# Altium PCB linkit-v4-0.3_6layers_smdonly.PcbDoc (part 1 of 5)
Units mil, origin at the board's own origin, x right, y up, seen from the top; angles counter-clockwise.
Board outline 2755.93 x 1377.98 mil, 6 copper layers (Top Layer, Int1 (GND), Int2 (Sign), Int3 (Sign), Int4 (PWR), Bottom Layer), stack 64.425 mil thick; 199 components, 156 nets, 686 pads, 678 vias.
Unrouted connection lines stored in the file: 1.
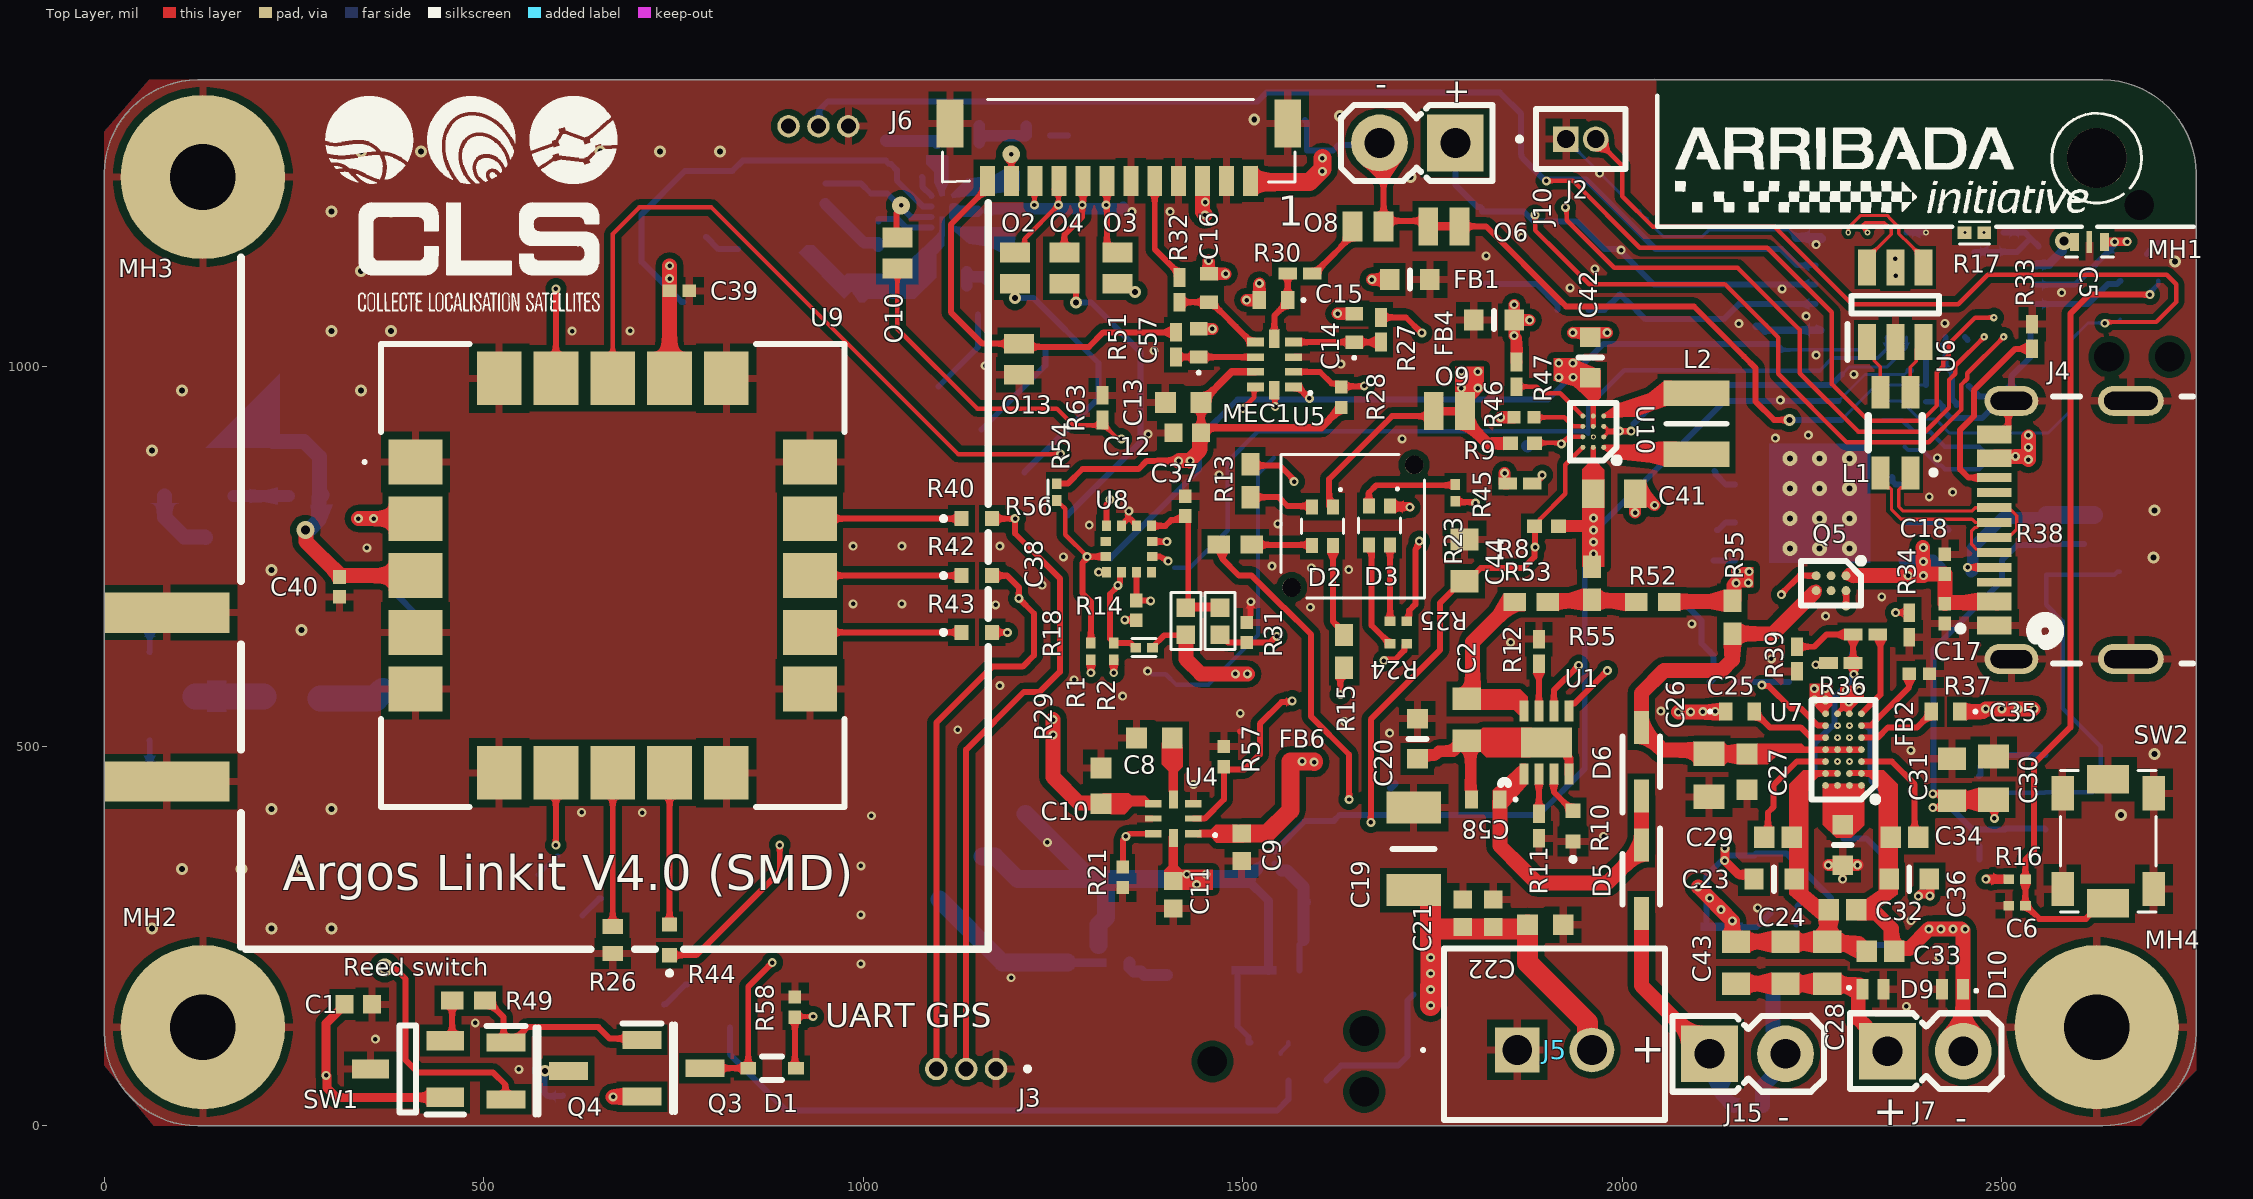
[diagram p0: Top Layer view]
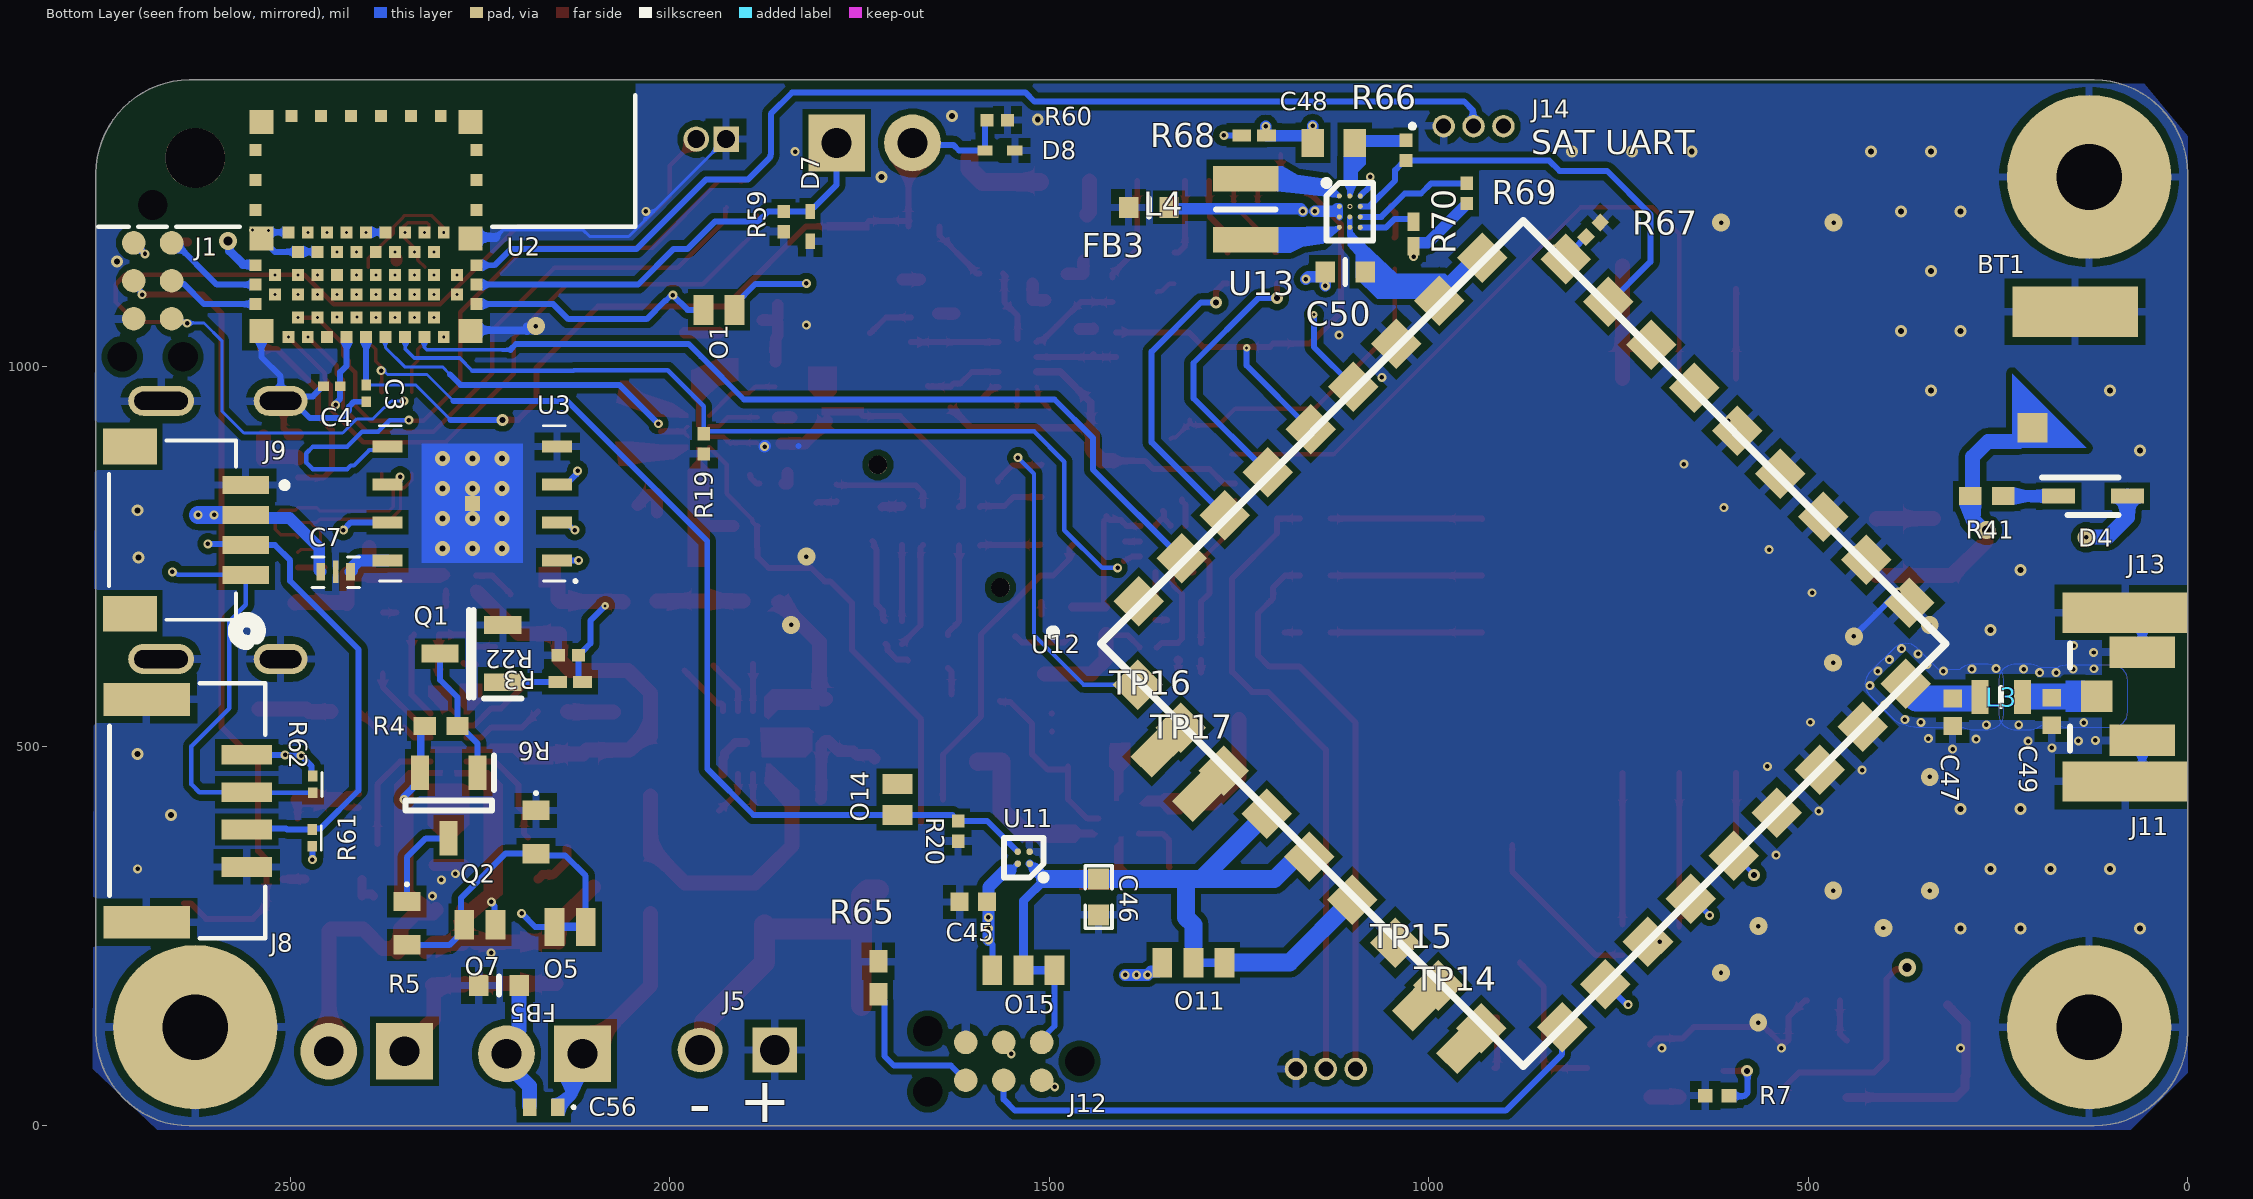
[diagram p1: Bottom Layer view, seen from below]
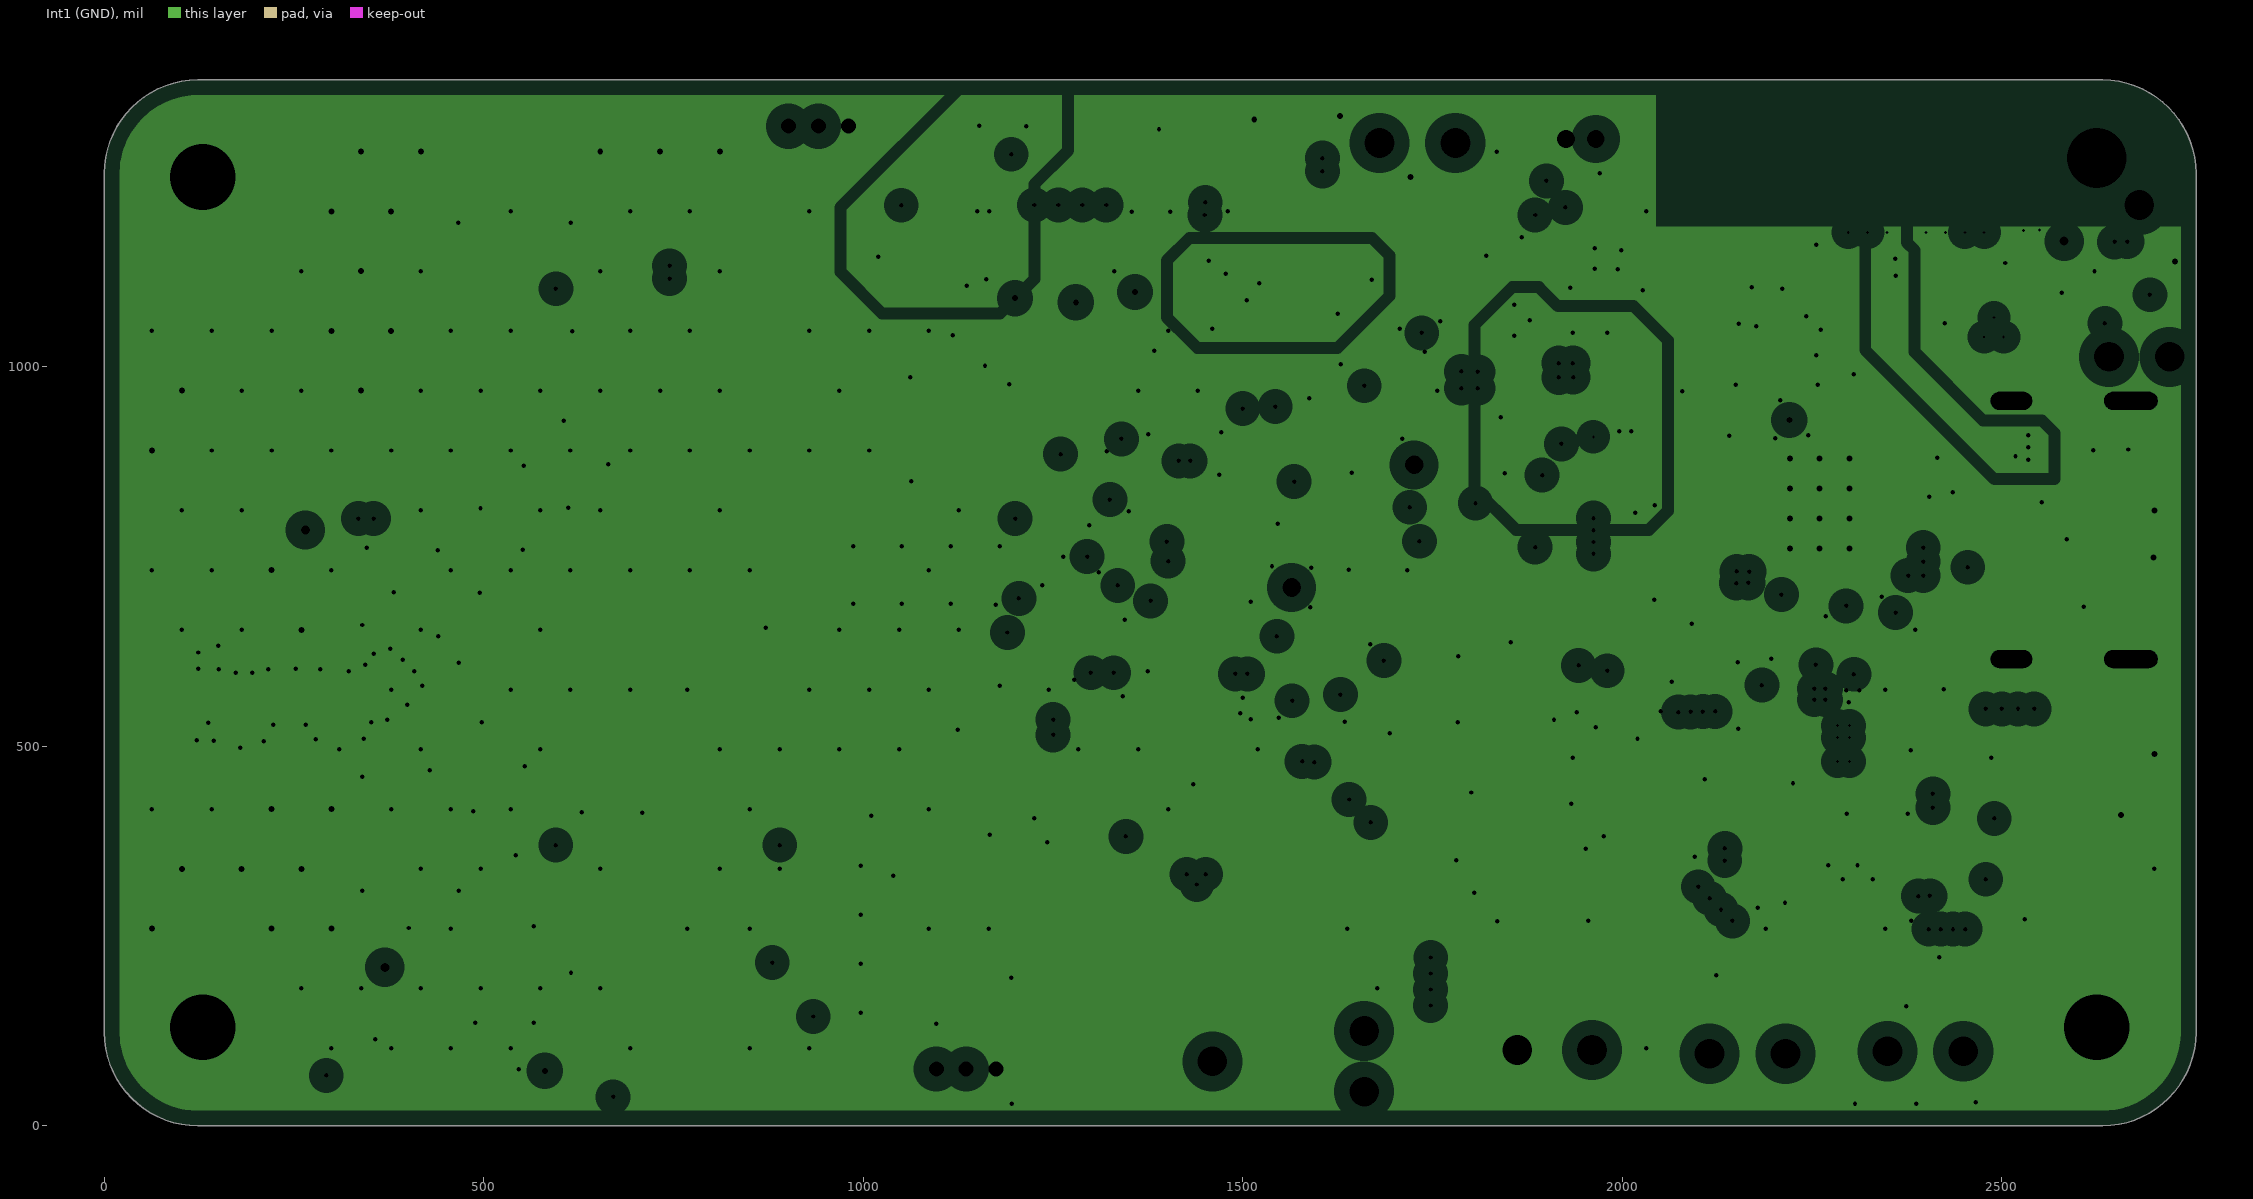
[diagram p2: Int1 (GND), clearances drawn from the general rule]
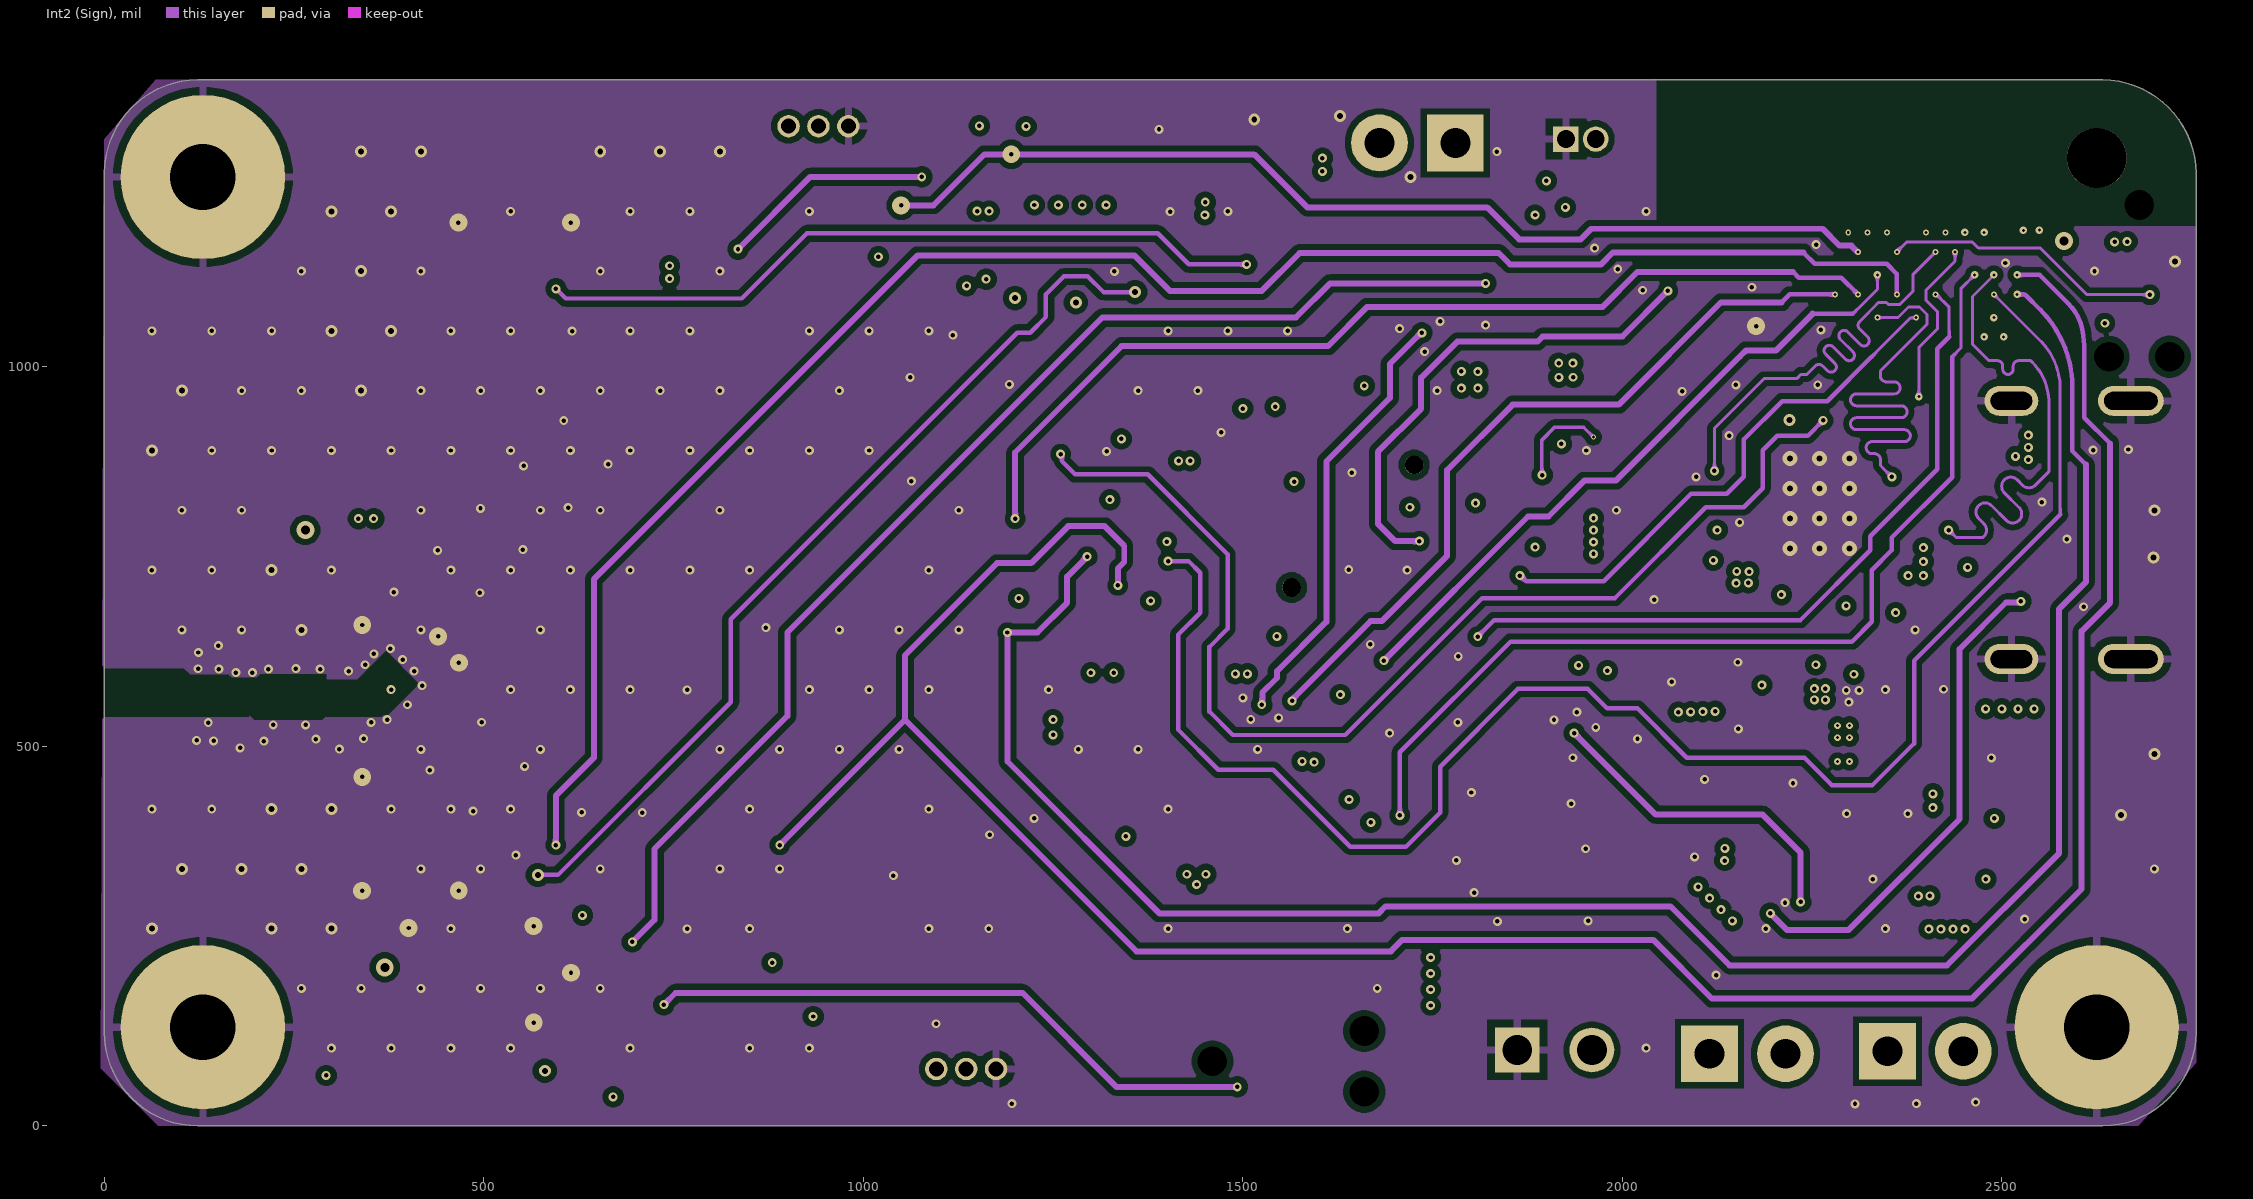
[diagram p3: Int2 (Sign)]
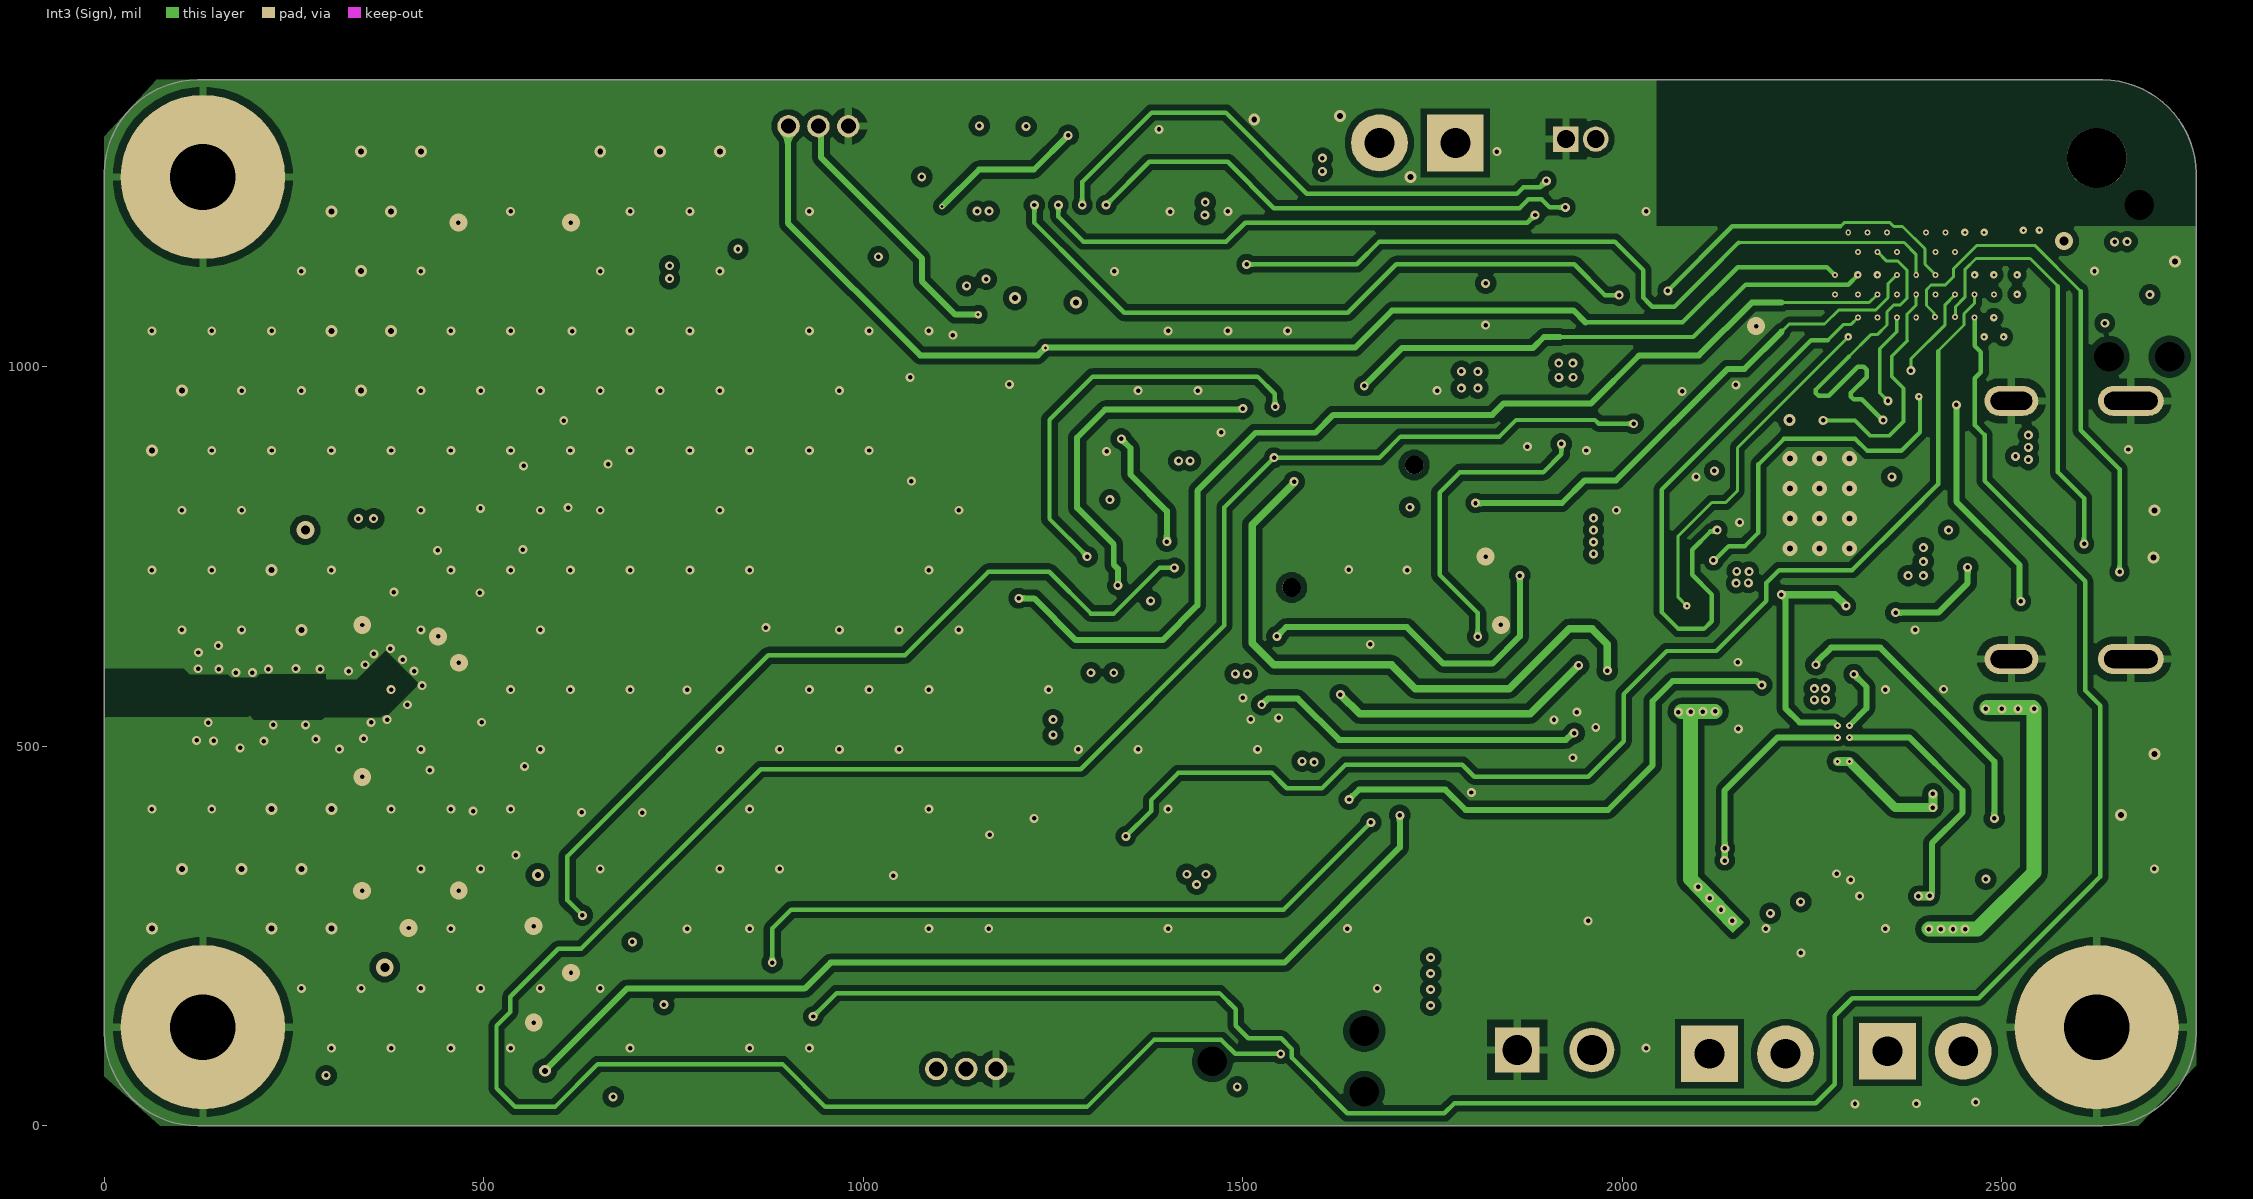
[diagram p4: Int3 (Sign)]
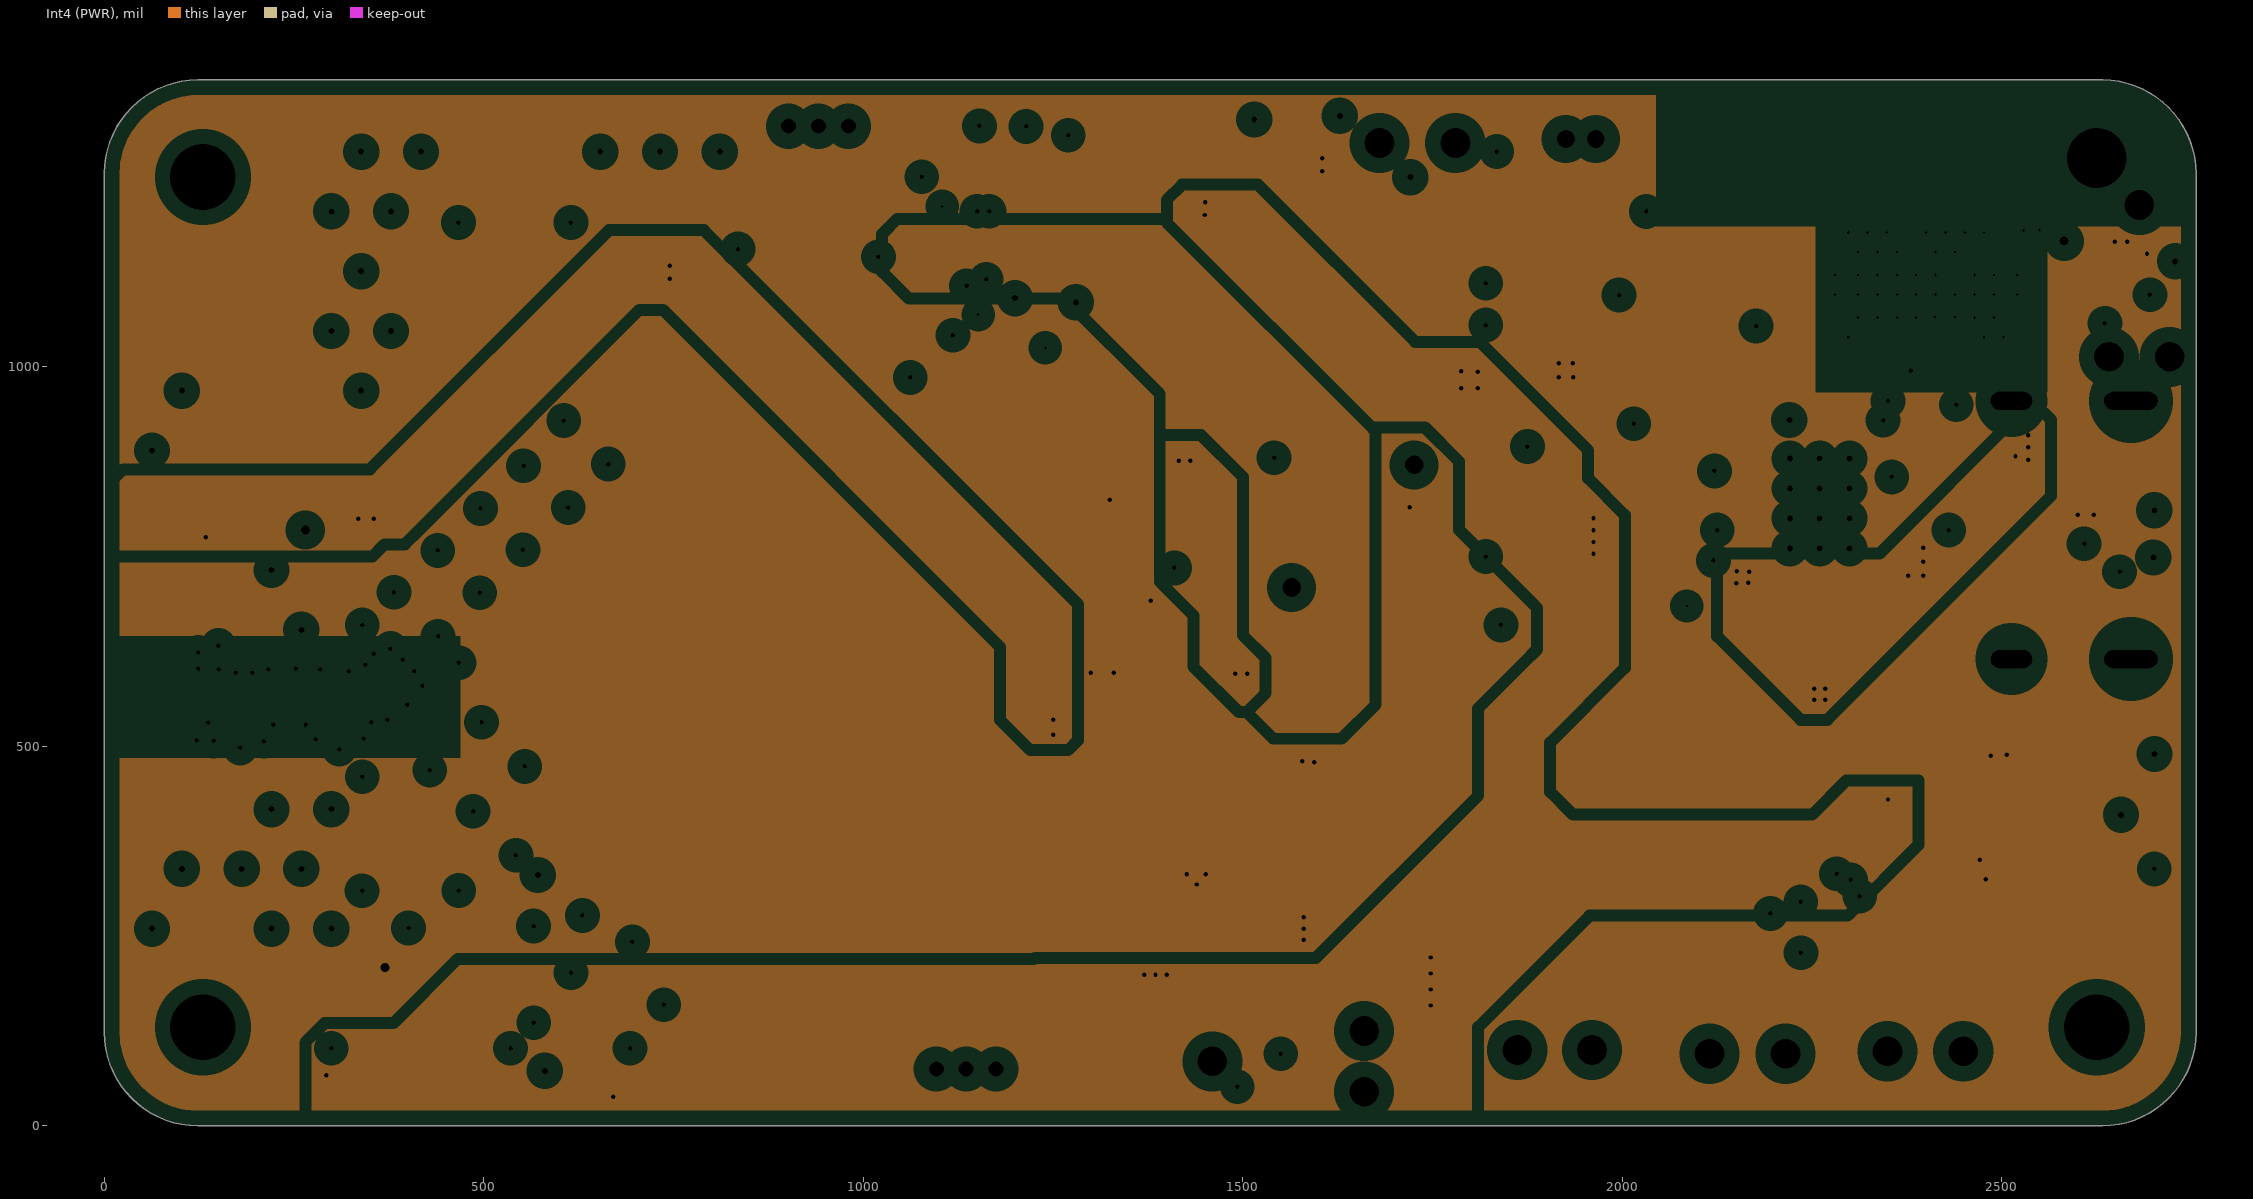
[diagram p5: Int4 (PWR), clearances drawn from the general rule]

## Layer stack, top to bottom
Top Solder: solder mask 1, SM-003, Dk 4
Top Layer: signal copper 1.378
Dielectric 1: prepreg 1.9508, S1000-2MB, Dk 4.25
Dielectric 2: prepreg 1.9508, S1000-2MB, Dk 4.25
Int1 (GND): plane copper 0.689, net (Multiple Nets)
Dielectric 3: prepreg 1.9508, S1000-2MB, Dk 4.25
Dielectric 4: prepreg 1.9508, S1000-2MB, Dk 4.25
Int2 (Sign): signal copper 1.378
Dielectric 5: core 41.9291, Core-001-HCC, Dk 4.25
Int3 (Sign): signal copper 1.378
Dielectric 6: prepreg 1.9508, S1000-2MB, Dk 4.25
Dielectric 7: prepreg 1.9508, S1000-2MB, Dk 4.25
Int4 (PWR): plane copper 0.689, net (Multiple Nets)
Dielectric 8: prepreg 1.9508, S1000-2MB, Dk 4.25
Dielectric 9: prepreg 1.9508, S1000-2MB, Dk 4.25
Bottom Layer: signal copper 1.378
Bottom Solder: solder mask 1, SM-003, Dk 4

## Board outline
0,123.05 0,129.94 -0.01,130.01 0,1254.93 cw(c124.03,1253.95) 123.04,1377.98 123.04,1377.96 2632.87,1377.96 2632.87,1377.98 cw(c2631.89,1253.95) 2755.92,1254.93 2755.91,1254.93 2755.91,123.04 2755.92,123.04 cw(c2631.89,124.03) 2632.87,0 123.04,0.01 cw(c124.03,124.04)

## Design rules (kind name [scope] priority, off if disabled: settings)
Clearance "Stitching GND" [IsStitchingVia and InNet('GND') vs (IsVia and (Not IsStitchingVia)) Or IsPad] p1: gap=39.37 ignorepadtopadclearanceinfootprint=FALSE
Clearance Clearance_1 [InDifferentialPairClass('USB')] p2: gap=4.96 ignorepadtopadclearanceinfootprint=FALSE
Clearance Clearance_50R [InNetClass('50R_Net') or InNetClass('50R_track') vs InNet('GND')] p3: gap=7.87 ignorepadtopadclearanceinfootprint=FALSE
Clearance Polygon_Clearance [InNamedPolygon('TOPGND')or InNamedPolygon('L2_GND')or InNamedPolygon('L3_GND')or InNamedPolygon('BOTGND')] p4: gap=7.87 ignorepadtopadclearanceinfootprint=FALSE
Clearance BGA_clearance_0.1 [WithinRoom('ISP1807')] p5: gap=3.94 ignorepadtopadclearanceinfootprint=FALSE
Clearance [All] p6: gap=5.91 ignorepadtopadclearanceinfootprint=FALSE
ComponentClearance ComponentClearance_option [(ObjectKind = 'Component') And ((Footprint = 'SMT-JUMPER_2_NC_TRACE_SILK')or(Footprint = 'SMT-JUMPER_2_NO_TRACE_SILK'))] p1: gap=0 collisioncheckmode=3 verticalgap=0 showdistances=FALSE
ComponentClearance ComponentClearance_1 [HasFootprint('KIM2 FOOTPRINT')] p2: gap=0 collisioncheckmode=3 verticalgap=0 showdistances=FALSE
ComponentClearance [All] p3: gap=10 collisioncheckmode=3 verticalgap=10 showdistances=FALSE
DiffPairsRouting [InDifferentialPairClass('USB')] p1: maxlimit=5 minlimit=4.99 mostfreqgap=5 toplayer_maxgap=4.99 toplayer_prefgap=4.99 toplayer_minwidth=4.4 toplayer_maxwidth=4.4 toplayer_prefwidth=4.4 midlayer1_mingap=5 midlayer1_minwidth=2.74 midlayer1_maxwidth=2.74 midlayer1_prefwidth=2.74 midlayer2_mingap=5 midlayer2_minwidth=2.74 midlayer2_maxwidth=2.74 midlayer2_prefwidth=2.74 bottomlayer_maxgap=4.99 bottomlayer_prefgap=4.99 bottomlayer_minwidth=4.4 bottomlayer_maxwidth=4.4 bottomlayer_prefwidth=4.4 impedanceprofiledriven=TRUE impedanceprofileid={9859EE02-7A4D-4AE4-9C0F-A4F87AE66AFC} impedanceprofilevalue=90.000000 maxuncoupledlength=500
HoleSize [All] p1: absolutevalues=TRUE maxlimit=100 minlimit=3.94 maxpercent=80.000 minpercent=20.000
HoleToHoleClearance [All] p1: gap=7.87 allowstackedmicrovias=TRUE
MaxMinImpedance "Schematic Impedance Constraint" [InNetClass('50R_Net')] p1: minimum=48.00 maximum=52.00
MaxMinImpedance "Schematic Impedance Constraint_2" [InDifferentialPairClass('USB')] p2: minimum=80.00 maximum=100.0
MaxMinImpedance "Schematic Impedance Constraint_1" [InNetClass('L1_Nets')] p3: minimum=80.00 maximum=100.0
MaxMinImpedance Satellite_1 [InNetClass('50R_Net') Or InNetClass('50R_track')] p4: minimum=48.00 maximum=52.00
MinimumSolderMaskSliver MinimumSolderMaskSliver_Sat_con [(Component = 'J13') vs (Component = 'J11')] p1: minsoldermaskwidth=0
MinimumSolderMaskSliver [All] p2: minsoldermaskwidth=3.94
PlaneClearance [All] p1: clearance=20
PlaneConnect PlaneConnect_PWR [InNetClass('Power')] p1: pad.planeconnectstyle=Relief pad.reliefexpansion=20 pad.reliefentries=4 pad.reliefconductorwidth=10 pad.reliefairgap=10 via.planeconnectstyle=Direct via.reliefexpansion=20 via.reliefentries=4 via.reliefconductorwidth=10 via.reliefairgap=10
PlaneConnect PlaneConnect_2 [InNet('GND')] p2: pad.planeconnectstyle=Relief pad.reliefexpansion=20 pad.reliefentries=4 pad.reliefconductorwidth=10 pad.reliefairgap=10 via.planeconnectstyle=Direct via.reliefexpansion=20 via.reliefentries=4 via.reliefconductorwidth=10 via.reliefairgap=10
PlaneConnect PlaneConnect_1 [InNet('PGND1')] p3: pad.planeconnectstyle=Relief pad.reliefexpansion=20 pad.reliefentries=4 pad.reliefconductorwidth=10 pad.reliefairgap=10 via.planeconnectstyle=Direct via.reliefexpansion=20 via.reliefentries=4 via.reliefconductorwidth=10 via.reliefairgap=10
PlaneConnect [All] p4: planeconnectstyle=Direct reliefexpansion=20 reliefentries=4 reliefconductorwidth=10 reliefairgap=10
PolygonConnect PolygonConnect_GND [InNet('GND')] p1: thpad.connectstyle=Relief thpad.reliefconductorwidth=10 thpad.reliefentries=4 thpad.polygonreliefangle="90 Angle" thpad.airgapwidth=10 smdpad.connectstyle=Relief smdpad.reliefconductorwidth=10 smdpad.reliefentries=4 smdpad.polygonreliefangle="90 Angle" smdpad.airgapwidth=10 via.connectstyle=Direct via.reliefconductorwidth=10 via.reliefentries=4 via.polygonreliefangle="90 Angle" via.airgapwidth=10
PolygonConnect [All] p2: connectstyle=Relief reliefconductorwidth=10 reliefentries=4 polygonreliefangle="90 Angle" airgapwidth=10
RoomDefinition "TPS63901 3V3&2V31" [InComponentClass('TPS63901 3V3&2V31')] p1: confinementstyle=ConfineIn formatcopy=TRUE lockcomponents=FALSE outline -1000,-1000 1000,-1000 1000,0 -1000,0
RoomDefinition "TPS63901 3V3&2V32" [InComponentClass('TPS63901 3V3&2V32')] p2: confinementstyle=ConfineIn formatcopy=TRUE lockcomponents=FALSE outline 1915,855 2005,855 2005,970 1915,970
RoomDefinition ISP1807 [InComponentClass('ISP1807') vs False] p3: confinementstyle=ConfineIn formatcopy=TRUE lockcomponents=FALSE outline 1917.56,1013.57 1917.56,1372.16 2882.44,1372.16 2882.44,1013.57
RoomDefinition Sensors [InComponentClass('Sensors') vs False] p4: confinementstyle=ConfineIn formatcopy=TRUE lockcomponents=FALSE outline 2195.12,644.96 2195.12,785.04 2354.88,785.04 2354.88,644.96
RoomDefinition Satellite [InComponentClass('Satellite')] p5: confinementstyle=ConfineIn formatcopy=TRUE lockcomponents=FALSE outline -5,790 1855,790 1855,0 -5,0
RoomDefinition SAM-M10Q [InComponentClass('SAM-M10Q') vs False] p6: confinementstyle=ConfineIn formatcopy=TRUE lockcomponents=FALSE outline 180,1205 1155,1205 1155,245 180,245
RoomDefinition Power [InComponentClass('Power') vs False] p7: confinementstyle=ConfineIn formatcopy=TRUE lockcomponents=FALSE outline 1980,635 1790,635 1790,340 1980,340
RoomDefinition Interface [InComponentClass('Interface') vs False] p8: confinementstyle=ConfineIn formatcopy=TRUE lockcomponents=FALSE outline 1870,1385 1000,1385 1000,1145 1870,1145
RoomDefinition "BQ51003YFPT WirelessCharger" [InComponentClass('BQ51003YFPT WirelessCharger') vs False] p9: confinementstyle=ConfineIn formatcopy=TRUE lockcomponents=FALSE outline 2465,705 2150,705 2150,240 2465,240
RoomDefinition BMA400 [InComponentClass('BMA400') vs False] p10: confinementstyle=ConfineIn formatcopy=TRUE lockcomponents=FALSE outline 1420,830 1285,830 1285,700 1420,700
RoutingVias RoutingVias_1 [All] p1: holewidth=28 width=50 viastyle="Through Hole" minholewidth=3.94 minwidth=7.87 maxholewidth=78.74 maxwidth=78.74
SilkToSolderMaskClearance [IsPad] p1: minsilkscreentomaskgap=3.54 clearancetoexposedcopper=TRUE
SolderMaskExpansion SolderMaskExpansion_2 [InComponent('U5')or InComponent('J2')] p1: expansion=0.79 istentingtop=FALSE
SolderMaskExpansion [IsVia] p2: expansion=4 istentingtop=TRUE
SolderMaskExpansion SolderMaskExpansion_1 [All] p3: expansion=1.57 istentingtop=FALSE
SupplyNets "Schematic Supply Nets_5" [InNet('VSYS_SMD')] p1: voltage=0.000
SupplyNets "Schematic Supply Nets_2" [InNet('PGND4')] p2: voltage=0.000
SupplyNets "Schematic Supply Nets_13" [InNet('PGND3')] p3: voltage=0.000
SupplyNets "Schematic Supply Nets_12" [InNet('AGND')] p4: voltage=0.000
SupplyNets "Schematic Supply Nets_11" [InNet('PGND1')] p5: voltage=0.000
SupplyNets "Schematic Supply Nets_9" [InNet('GND')] p6: voltage=0.000
SupplyNets "Schematic Supply Nets_8" [InNet('VSENS_2')] p7: voltage=0.000
SupplyNets "Schematic Supply Nets_7" [InNet('VBUS')] p8: voltage=0.000
SupplyNets "Schematic Supply Nets_3" [InNet('VSENS_1')] p9: voltage=0.000
SupplyNets "Schematic Supply Nets_1" [InNet('VSYS')] p10: voltage=0.000
SupplyNets "Schematic Supply Nets" [InNet('VBAT')] p11: voltage=0.000
Width "Schematic Width Constraint_12" [InNetClass('Power')] p1: maxlimit=39.37 minlimit=10 preferedwidth=19.68 toplayer_minwidth=15.75 midlayer1_maxwidth=10 midlayer1_prefwidth=10 midlayer2_maxwidth=10 midlayer2_prefwidth=10 bottomlayer_minwidth=15.75 minimp=50.000000 maximp=50.000000 favimp=50.000000
Width Width_50R [InNetClass('50R_Net') or InNetClass('50R_track')] p2: maxlimit=34.26 minlimit=4.48 preferedwidth=34.26 toplayer_minwidth=13.64 toplayer_maxwidth=13.64 toplayer_prefwidth=13.64 midlayer1_maxwidth=4.48 midlayer1_prefwidth=4.48 midlayer2_maxwidth=4.48 midlayer2_prefwidth=4.48 bottomlayer_minwidth=34.26 impedanceprofiledriven=TRUE impedanceprofileid={F9304162-404A-44E2-9895-C2B8E0A9A055} impedanceprofilevalue=50.000000 minimp=50.000000 maximp=50.000000 favimp=50.000000
Width Width_ISP [WithinRoom('ISP1807')] p3: maxlimit=15.75 minlimit=3.94 preferedwidth=3.94 minimp=50.000000 maximp=50.000000 favimp=50.000000
Width "Schematic Width Constraint_9" [InNet('NetC5_2')] p4: maxlimit=39.37 minlimit=10 preferedwidth=19.68 toplayer_minwidth=15.75 midlayer1_maxwidth=10 midlayer1_prefwidth=10 midlayer2_maxwidth=10 midlayer2_prefwidth=10 bottomlayer_minwidth=15.75 minimp=50.000000 maximp=50.000000 favimp=50.000000
Width "Schematic Width Constraint" [InNet('NetC5_2')] p5: maxlimit=10 minlimit=10 preferedwidth=10
Width [All] p6: maxlimit=39.37 minlimit=3.94 preferedwidth=7.87 minimp=50.000000 maximp=50.000000 favimp=50.000000
22 further rules are at their usual default settings.

## Classes and differential pairs
net class TP17_Nets: SMD_SCL
net class TP16_Nets: SMD_SDA
net class TP15_Nets: SMD_RF_NRST
net class TP14_Nets: SMD_RF_BUSY
channel class TPS63901_BuckBoost_lowIq_3V3&2V3_400mA: "TPS63901 3V3&2V31" "TPS63901 3V3&2V32"
net class U13_Nets: "LX1_TPS63901 3V3&2V32" "LX2_TPS63901 3V3&2V32" NetR68_1 NetR69_1 NetR70_2 PGND1 "SEL_TPS63901 3V3&2V32" VBAT "VOUT_TPS63901 3V3&2V32" VPA_EN
net class R70_Nets: NetR70_2 PGND1
net class R69_Nets: NetR69_1 PGND1
net class R68_Nets: NetR68_1 PGND1
net class R67_Nets: GND VPA_EN
net class R66_Nets: "SEL_TPS63901 3V3&2V32" VBAT
net class R65_Nets: GND NetJ12_6
net class R8_Nets: VBAT VSYS_EN
net class L4_Nets: "LX1_TPS63901 3V3&2V32" "LX2_TPS63901 3V3&2V32"
net class FB3_Nets: GND PGND1
net class C50_Nets: PGND1 "VOUT_TPS63901 3V3&2V32"
net class C38_Nets: GND VSYS
component class "TPS63901 3V3&2V32": C48 C50 FB3 L4 R68 R69 R70 U13
net class U11_Nets: GND SAT_EN VSYS VSYS_SMD
net class C48_Nets: PGND1 VBAT
net class C46_Nets: GND VSYS_SMD
component class SMD: C45 C46 O11 R66 R67 U11 U12
net class O10_Nets: GPIO INT2_IMU
net class O13_Nets: ADC3 GND
net class FB6_Nets: GND PGND4
net class R63_Nets: GND INT2_IMU
net class R62_Nets: EXT_SCL VSYS
net class R61_Nets: EXT_SDA VSYS
net class R60_Nets: GND SWS_IN
net class R59_Nets: GND SLOW_SWS_SEND
net class R58_Nets: GND POWER_CONTROL
net class R57_Nets: GND VADC_EN
net class R56_Nets: I2C_SDA VSENS_1
net class R54_Nets: I2C_SCL VSENS_1
net class D10_Nets: COIL-2 GND
net class D9_Nets: COIL-1 GND
net class D8_Nets: GND SWS_IN
net class D7_Nets: GND SLOW_SWS_SEND
net class C43_Nets: COIL-1 NetC23_1
net class L3_Nets: NetC49_2 NetL2_1 NetL2_2 SMD_ANT
net class SPI: SPI_CLK SPI_MISO SPI_MOSI
net class QSPI: QSPI_CLK QSPI_IO0 QSPI_IO1 QSPI_IO2 QSPI_IO3
differential pair class USB: USB USB_D USB_L
net class C33_Nets: COIL-2 NetC23_1
net class FB2_Nets: GND PGND3
net class D6_Nets: NetC58_1 RX-OUT
net class R55_Nets: NetR52_1 VBAT
net class D5_Nets: NetC58_1 SPV+
net class R53_Nets: NetC2_2 NetR52_1
net class R52_Nets: NetR52_1 VBUS
net class MH4_Nets: GND NetMH4_1
net class MH3_Nets: GND NetMH3_1
net class MH2_Nets: GND NetMH2_1
net class FB5_Nets: GND SPV-
net class R51_Nets: ADC3 NetC57_1
net class J15_Nets: SPV+ SPV-
net class J14_Nets: GND SAT_UART_RX SAT_UART_TX
net class C58_Nets: NetC58_1 PGND4
net class C57_Nets: AGND NetC57_1
net class FB1_Nets: AGND GND
net class C56_Nets: SPV+ SPV-
net class FB4_Nets: GND PGND1
net class Satellite_Nets: NetC49_2 NetJ12_1 NetJ12_6 NetU13_11 NetU13_12
net class U12_Nets: GND NetO11_1 NetU11_20 NetU11_22 NetU11_23 NetU11_25 NetU11_27 NetU11_28 NetU11_44 NetU11_46 NetU11_48 nRESET-SAT SAT_INT SAT_SPI_MISO SAT_SPI_MOSI SAT_SPI_NSS SAT_SPI_SCK SAT_SWCLK SAT_SWDIO SAT_UART_RX SAT_UART_TX SAT_WKUP "SEL_TPS63901 3V3&2V32" SMD_ANT SMD_PB13 SMD_RF_BUSY SMD_RF_NRST SMD_SCL SMD_SDA "VOUT_TPS63901 3V3&2V32" VPA_EN VSYS_SMD
net class U10_Nets: "LX1_TPS63901 3V3&2V31" "LX2_TPS63901 3V3&2V31" NetR45_1 NetR46_1 NetR47_2 PGND1 VBAT VCC_SEL VSYS VSYS_EN
net class U9_Nets: GND GPS_INT GPS_NRST GPS_PPS NetBT1_+ NetR40_1 NetR42_1 NetR43_1 NetR44_2 SAFE VSENS_2
net class U8_Nets: BMA_PWR GND I2C_SCL I2C_SDA INT1_IMU INT2_IMU NetU8_4 NetU8_11 VSYS
net class U7_Nets: BOOT1 BOOT2 CLAMP1 CLAMP2 COIL-2 COMM1 COMM2 GND NetC23_1 NetC30_1 NetQ5_A2 NetR36_2 NetR37_1 NetR38_2 PGND3 RX-OUT VBUS WIRELESS_NCHG_LED
net class U6_Nets: GND USB_D_N USB_D_P USB_L_N USB_L_P VBUS
net class U5_Nets: ADC_ALERT_RDY GND I2C_SCL I2C_SDA NetC14_1 NetC15_1 NetC16_1 NetC57_1 NetU5_7 VSENS_1
net class U4_Nets: GND GPS_PWR_EN VADC_EN VSENS_1 VSENS_2 VSYS
net class U3_Nets: GND NetC7_2 QSPI_CLK QSPI_CS QSPI_IO0 QSPI_IO1 QSPI_IO2 QSPI_IO3
net class U2_Nets: ADC_ALERT_RDY BAT_AN BAT_READ_EN EXT_SCL EXT_SDA GND GPIO GPS_INT GPS_NRST GPS_PPS GPS_PWR_EN GPS_UART_RX GPS_UART_TX I2C_SCL I2C_SDA IMU_PWR INT1_IMU KIM_PWR_ON LED_B LED_G LED_R NetC5_2 NetR17_1 NetR17_2 NetU2_48 NetU2_59 NetU2_65 NetU2_66 NetU2_67 NetU2_68 NetU2_69 NetU2_70 NetU2_71 NetU2_72 NetU2_73 NetU2_74 NetU2_75 NetU2_76 NetU2_77 NetU2_78 nRESET nRESET-SAT NRF_DBG POWER_CONTROL QSPI_CLK QSPI_CS QSPI_IO0 QSPI_IO1 QSPI_IO2 QSPI_IO3 REED_MCU SAT_EN SAT_INT SAT_UART_RX SAT_UART_TX SAT_WKUP SLOW_SWS_SEND SPI_CLK SPI_MISO SPI_MOSI SPI_NSS SWDCLK SWDIO SWS USB_D_N USB_D_P VADC_EN VBUS VCC_SEL
net class U1_Nets: NetC2_2 NetC58_1 NetR10_2 NetR11_2 NetR12_2 NPG_LED PGND4 STAT_LED
net class SW2_Nets: GND nRESET
net class SW1_Nets: GND NetR49_2 VBAT
net class Sensors_Nets: ADC0 ADC1 ADC2 ADC3 ADC_ALERT_RDY AGND BMA_PWR GND GPS_INT GPS_NRST GPS_PPS GPS_PWR_EN GPS_UART_RX GPS_UART_TX I2C_SCL I2C_SDA IMU_PWR INT1_IMU INT2_IMU NetC14_1 NetC15_1 NetC16_1 NetC57_1 NetU5_7 SAFE VADC_EN VSENS_1 VSENS_2 VSYS
net class R49_Nets: NetQ3_1 NetR49_2
net class R47_Nets: NetR47_2 PGND1
net class R46_Nets: NetR46_1 PGND1
net class R45_Nets: NetR45_1 PGND1
net class R44_Nets: I2C_SDA NetR44_2
net class R43_Nets: I2C_SCL NetR43_1
net class R42_Nets: GPS_UART_TX NetR42_1
net class R41_Nets: NetBT1_+ NetD4_1
net class R40_Nets: GPS_UART_RX NetR40_1
net class R39_Nets: GND NetR36_2
net class R38_Nets: NetR36_2 NetR38_2
net class R37_Nets: GND NetR37_1
net class R36_Nets: NetC30_1 NetR36_2
net class R35_Nets: RX-OUT VBUS
net class R34_Nets: GND NetJ4_A5
net class R33_Nets: GND NetJ4_B5
net class R32_Nets: ADC2 NetC16_1
net class R31_Nets: BMA_PWR IMU_PWR
net class R30_Nets: ADC1 NetC15_1
net class R29_Nets: BMA_PWR VSENS_1
net class R27_Nets: ADC0 NetC14_1
net class R26_Nets: GND SAFE
net class R25_Nets: LED_G NetD3_4
net class R24_Nets: LED_B NetD3_3
net class R23_Nets: LED_R NetD3_2
net class R22_Nets: BAT_READ_EN GND
net class R21_Nets: GND GPS_PWR_EN
net class R28_Nets: ADC_ALERT_RDY VSENS_1
net class R20_Nets: GND SAT_EN
net class R19_Nets: GND SAT_WKUP
net class R18_Nets: GND IMU_PWR
net class R17_Nets: NetR17_1 NetR17_2
net class R16_Nets: nRESET VSYS
net class R15_Nets: NetD2_4 NPG_LED
net class R14_Nets: NetD2_3 WIRELESS_NCHG_LED
net class R13_Nets: NetD2_2 STAT_LED
net class R12_Nets: GND NetR12_2
net class R11_Nets: GND NetR11_2
net class R10_Nets: GND NetR10_2
net class R9_Nets: VBAT VCC_SEL
net class C44_Nets: GND VSYS_EN
net class R7_Nets: GND REED_MCU
net class R6_Nets: GND VBAT_SENSE
net class R5_Nets: NetQ2_3 VBAT_SENSE
net class R4_Nets: NetQ1_3 VBAT
net class R3_Nets: BAT_READ_EN NetQ1_1
net class R2_Nets: I2C_SDA VSYS
net class R1_Nets: I2C_SCL VSYS
net class Q5_Nets: NetQ5_A2 NetQ5_B1 NetQ5_B2 RX-OUT VBUS
net class Q4_Nets: NetQ3_1 REED_MCU VSYS
net class Q3_Nets: NetQ3_1 VBAT VSYS_EN
net class Q2_Nets: NetQ1_3 NetQ2_3 VBAT
net class Q1_Nets: GND NetQ1_1 NetQ1_3
net class Power: COIL-2 NetC2_2 NetC23_1 NetC58_1 NetR52_1 RX-OUT SPV+ SPV- VBAT VBUS
net class Power_Nets: COIL-1 COIL-2 GND NetC2_2 NetC58_1 NetD2_1 NetD2_2 NetD2_3 NetD2_4 NetQ3_1 NetR10_2 NetR11_2 NetR12_2 NetR49_2 NetR52_1 NPG_LED PGND4 POWER_CONTROL REED_MCU RX-OUT SPV+ SPV- STAT_LED VBAT VBUS VCC_SEL VSYS VSYS_EN WIRELESS_NCHG_LED
net class O14_Nets: SAT_EN VSYS
net class O15_Nets: NetJ12_1 VSYS VSYS_SMD
net class O11_Nets: NetO11_1 VBAT VSYS_SMD
net class O9_Nets: NetD2_1 VBAT
net class O8_Nets: ADC1 SWS_IN
net class O7_Nets: ADC0 VBAT_SENSE
net class O6_Nets: SWS SWS_IN
net class O5_Nets: BAT_AN VBAT_SENSE
net class O4_Nets: SAT_SPI_MISO SPI_MISO
net class O3_Nets: SAT_SPI_MOSI SPI_MOSI
net class O2_Nets: SAT_SPI_SCK SPI_CLK
net class O1_Nets: SAT_SPI_NSS SPI_NSS
net class 50R_Net: GND NetC49_2 NetL2_1 NetL2_2 SMD_ANT
net class L2_Nets: "LX1_TPS63901 3V3&2V31" "LX2_TPS63901 3V3&2V31"
net class L1_Nets: USB_L_N USB_L_P USB_N USB_P
net class J13_Nets: GND NetC49_2
net class J12_Nets: GND NetJ12_1 NetJ12_6 nRESET-SAT SAT_SWCLK SAT_SWDIO
net class J11_Nets: GND NetC49_2
net class J10_Nets: SLOW_SWS_SEND SWS_IN
net class J9_Nets: EXT_SCL EXT_SDA GND VSYS
net class J8_Nets: EXT_SCL EXT_SDA GND VSYS
net class J7_Nets: COIL-1 COIL-2
net class J6_Nets: ADC2 ADC3 GND GPIO SPI_CLK SPI_MISO SPI_MOSI SPI_NSS VBAT VSYS
net class J5_Nets: GND VBAT
net class J4_Nets: GND NetJ4_A5 NetJ4_A8 NetJ4_B5 NetJ4_B8 USB_N USB_P VBUS
net class J3_Nets: GND GPS_UART_RX GPS_UART_TX
net class J2_Nets: GND NRF_DBG
net class J1_Nets: GND nRESET NRF_DBG SWDCLK SWDIO VSYS
net class ISP1807_Nets: LED_B LED_G LED_R NetC5_2 NetC7_2 NetD3_2 NetD3_3 NetD3_4 NetR17_1 NetR17_2 NetU2_48 NetU2_59 NetU2_65 NetU2_66 NetU2_67 NetU2_68 NetU2_69 NetU2_70 NetU2_71 NetU2_72 NetU2_73 NetU2_74 NetU2_75 NetU2_76 NetU2_77 NetU2_78 nRESET QSPI_CLK QSPI_CS QSPI_IO0 QSPI_IO1 QSPI_IO2 QSPI_IO3 SWDCLK SWDIO
net class Interface_Nets: NetJ4_A5 NetJ4_A8 NetJ4_B5 NetJ4_B8 USB_L_N USB_L_P USB_N USB_P
net class D4_Nets: NetD4_1 VSENS_2
net class D3_Nets: NetD3_2 NetD3_3 NetD3_4 VSYS
net class D2_Nets: NetD2_1 NetD2_2 NetD2_3 NetD2_4
net class D1_Nets: POWER_CONTROL VSYS_EN
net class C49_Nets: GND NetC49_2
net class C47_Nets: GND SMD_ANT
net class C42_Nets: PGND1 VSYS
net class C41_Nets: PGND1 VBAT
net class C40_Nets: GND NetBT1_+
net class C39_Nets: GND VSENS_2
net class C45_Nets: GND VSYS
net class C37_Nets: BMA_PWR GND
net class C36_Nets: CLAMP2 COIL-2
net class C35_Nets: COIL-2 COMM2
net class C34_Nets: BOOT2 COIL-2
net class C32_Nets: COIL-2 NetC23_1
net class C31_Nets: GND NetC30_1
net class C30_Nets: GND NetC30_1
net class C29_Nets: BOOT1 NetC23_1
net class C28_Nets: COIL-1 NetC23_1
net class C27_Nets: GND RX-OUT
net class C26_Nets: GND RX-OUT
net class C25_Nets: COMM1 NetC23_1
net class C24_Nets: COIL-1 NetC23_1
net class C23_Nets: CLAMP1 NetC23_1
net class C22_Nets: GND VBAT
net class C21_Nets: GND VBAT
net class C20_Nets: GND VBAT
net class C19_Nets: GND VBAT
net class C18_Nets: GND VBUS
net class C17_Nets: GND VBUS
net class C16_Nets: AGND NetC16_1
net class C15_Nets: AGND NetC15_1
net class C14_Nets: AGND NetC14_1
net class C13_Nets: GND VSENS_1
net class C12_Nets: GND VSENS_1
net class C11_Nets: GND VSYS
net class C10_Nets: GND VSENS_2
net class C9_Nets: GND VSYS
net class C8_Nets: GND VSENS_1
net class C7_Nets: GND NetC7_2 VSYS
net class C6_Nets: GND nRESET
net class C5_Nets: GND NetC5_2 VSYS
net class C4_Nets: BAT_AN GND
net class C3_Nets: GND SWS
net class C2_Nets: NetC2_2 PGND4
net class C1_Nets: GND VBAT
net class BT1_Nets: GND NetBT1_+
component class U_linkit-v4: O1 O2 O3 O4 O5 O6 O7 O8 O10 O13 Q1 Q2 R1 R2 R3 R4 R5 R6 R61 R62
component class "TPS63901 3V3&2V31": C41 C42 FB4 L2 R45 R46 R47 U10
component class Sensors: C8 C9 C10 C11 C12 C13 C14 C15 C16 C57 FB1 R26 R27 R28 R29 R30 R31 R32 R51 R54 R56 R63 U4 U5
component class Satellite: "\"" C C47 C49 J11 J12 J13 L3 O14 O15 R65 TP14 TP15 TP16 TP17
component class SAM-M10Q: BT1 C39 C40 D4 R40 R41 R42 R43 R44 U9
component class Power: C1 C2 C44 C56 C58 D1 D2 D5 D6 FB5 FB6 O9 Q3 Q4 R7 R8 R9 R10 R11 R12 R13 R14 R15 R49 R52 R53 R55 R58 SW1 U1
component class ISP1807: C3 C4 C5 C6 C7 D3 J1 MEC1 R16 R17 R18 R19 R20 R21 R22 R23 R24 R25 R57 SW2 U2 U3
component class Interface: C17 C18 C19 C20 C21 C22 D7 D8 D9 D10 J2 J3 J4 J5 J6 J7 J8 J9 J10 J14 J15 L1 MH1 MH2 MH3 MH4 R33 R34 R59 R60 U6
component class "BQ51003YFPT WirelessCharger": C23 C24 C25 C26 C27 C28 C29 C30 C31 C32 C33 C34 C35 C36 C43 FB2 Q5 R35 R36 R37 R38 R39 U7
component class BMA400: C37 C38 U8
differential pair USB: +USB_P -USB_N
differential pair USB_L: +USB_L_P -USB_L_N
differential pair USB_D: +USB_D_P -USB_D_N

## Components (designator, comment, footprint, x,y, rotation, side; value= is the part's Value field where it differs from the comment)
BT1 "6.8MM_COIN_CELL" MS421R_IV03E 124.92,999.68 r0 bottom
C1 "GRM155R61E105KE11D" CAPC1005X55N 335,160 r0 top value=1uF
C2 "GCM188R71C105KA64D" CAPC1608X90N 1795,535 r90 top value=1uF (schematic designator C3)
C3 "100NF 0201 35V 10% X5R" CAP0201L 2400,965 r90 bottom value=100nF (schematic designator C4)
C4 "100NF 0201 35V 10% X5R" CAP0201L 2445.06,974.48 r180 bottom value=100nF (schematic designator C5)
C5 "470NF 0402 6.3V +50%/-20%" YFF15PC 2615.31,1164.41 r180 top value=470nF (schematic designator C6)
C6 "100NF 0201 35V 10% X5R" CAP0201L 2520,290 r0 top value=100nF (schematic designator C7)
C7 "470NF 0402 6.3V +50%/-20%" YFF15PC 2440,730 r180 bottom value=470nF (schematic designator C8)
C8 "GRM155R71C104KA88D" 0402 1408.43,510.89 r180 top value=100nF (schematic designator C9)
C9 "1uF" CAPC1005X55N 1498.43,366.89 r90 top (schematic designator C10)
C10 "GRM155R71C104KA88D" 0402 1313.43,422.99 r90 top value=100nF (schematic designator C11)
C11 "1uF" CAPC1005X55N 1408.43,304.68 r90 top (schematic designator C12)
C12 "1uF" CAPC1005X55N 1426.97,913.03 r0 top (schematic designator C13)
C13 "GRM155R71C104KA88D" 0402 1446.46,953.03 r180 top value=100nF (schematic designator C14)
C14 "GRM1555CYA103GE01D" GRM15x 1646.81,1051.3 r90 top value=0.01uF (schematic designator C15)
C15 "GRM1555CYA103GE01D" GRM15x 1540.51,1087.91 r180 top value=0.01uF (schematic designator C16)
C16 "GRM1555CYA103GE01D" GRM15x 1455.39,1103.85 r90 top value=0.01uF (schematic designator C18)
C17 "1uF" CAPC0603X35N 2425,675 r90 top (schematic designator C19)
C18 "100nF" CAPC0603X33N 2425,740 r270 top value=0.1uF (schematic designator C20)
C19 "GRM31CR61A107MEA8L" CAPC3216X180N 1725,365 r270 top value=100uF (schematic designator C21)
C20 "GRM155R61A106ME11D" CAPC1005X55N 1790,280 r90 top value=10uF (schematic designator C22)
C21 "GRM155R61E105KE11D" CAPC1005X55N 1830,280 r90 top value=1uF (schematic designator C23)
C22 "GRM155R71C104KA88D" 0402 1873.62,265 r0 top value=100nF (schematic designator C24)
C23 "GRM188R71E474KA12D" GRM18x 2200,325 r180 top value=0.47uF (schematic designator C1)
C24 "GCJ188R71H563KA12J" CAPC1608X90N 2215,215 r90 top value=56nF (schematic designator C7)
C25 "GRM155R71E223KA61D" GRM15x 2155,545.75 r0 top value=0.022uF (schematic designator C2)
C26 "EMK107BBJ106MA-T" CAPC1709X100N 2114.25,461.89 r270 top (schematic designator C17)
C27 "GRM155R71C104KA88D" 0402 2164.25,491.38 r270 top value=100nF (schematic designator C16)
C28 "GRM188R71H103KA01D" CAPC1608X90N 2270,215 r90 top value=0.01uF (schematic designator C6)
C29 "GRM155R71E103KA01D" CAPC1005X70N 2205,380 r180 top value=0.01uF (schematic designator C3)
C30 "EMK107BBJ106MA-T" CAPC1709X100N 2489.25,458.11 r90 top (schematic designator C14)
C31 "GRM188R61C475KE11J" CAPC1608X90N 2434.25,456.15 r90 top value=4.7uF (schematic designator C15)
C32 "GRM155R71H681KA01D" CAPC1005X70N 2290,285 r180 top value=680pF (schematic designator C4)
C33 "GRM155R71H271KA01J" CAPC1005X70N 2340,230 r180 top value=270pF (schematic designator C5)
C34 "GRM155R71E103KA01D" CAPC1005X70N 2371.7,380 r0 top value=0.01uF (schematic designator C13)
C35 "GRM155R71E223KA61D" GRM15x 2425.79,545.75 r180 top value=0.022uF (schematic designator C12)
C36 "GRM188R71E474KA12D" GRM18x 2377.99,325 r0 top value=0.47uF (schematic designator C11)
C37 "100nF" CAPC0603X33N 1424.37,816.5 r270 top value=0.1uF (schematic designator C1)
C38 "100nF" CAPC0603X33N 1359.71,679.22 r90 top value=0.1uF (schematic designator C2)
C39 "100nF" CAPC0603X33N 757.8,1100 r0 top value=0.1uF (schematic designator C1)
C40 "100nF" CAPC0603X33N 310,710 r90 top value=0.1uF (schematic designator C2)
C41 "GRM188R61A106MAALJ" CAPC1608X90N 1989.36,832.79 r0 top value=10uF (schematic designator C1)
C42 "GRM188R61A226ME15D" GRM18x 1957.77,1012.23 r90 top value=22uF (schematic designator C2)
C43 "C0603C123K5RACTU" CAPC1608X90N 2150,215 r90 top value=12nF (schematic designator C8)
C44 "GCM188R71C105KA64D" CAPC1608X90N 1792.2,745 r90 top value=1uF (schematic designator C26)
C45 "1uF" CAPC1005X55N 1600,295 r180 bottom (schematic designator C28)
C46 "GRM155R71C104KA88D" 0402 1435,326.38 r270 bottom value=100nF (schematic designator C29)
C47 "NC" CAPC1005X55N 310,545 r90 bottom (schematic designator C25)
C48 "GRM188R61A106MAALJ" CAPC1608X90N 1125,1295 r0 bottom value=10uF (schematic designator C1)
C49 "NC" CAPC1005X55N 179.33,545.92 r90 bottom (schematic designator C27)
C50 "GRM188R61A226ME15D" GRM18x 1110,1125 r0 bottom value=22uF (schematic designator C2)
C56 "GRM155R61H105ME05J" GRM15x 2165.92,24.6 r0 bottom value=1uF (schematic designator C2)
C57 "GRM1555CYA103GE01D" GRM15x 1441.97,1031.61 r90 top value=0.01uF (schematic designator C17)
C58 "GRM155R61H105ME05J" GRM15x 1820,430 r180 top value=1uF (schematic designator C32)
D1 "RB751S40" SODFL1608X65N 880,75.98 r0 top
D2 "APHF1608LSEEQBDZGKC" "LED RGB 0603" 1605,790 r270 top
D3 "APHF1608LSEEQBDZGKC" "LED RGB 0603" 1680,791.02 r270 top
D4 "PMEG4005EJ" SOD2512X80N 124.92,829.68 r180 bottom (schematic designator D1)
D5 "PMEG4010CEAX" SOD2512X110N 2025,325 r270 top (schematic designator D4)
D6 "PMEG4010CEAX" SOD2512X110N 2025,479.72 r90 top (schematic designator D5)
D7 "ESD9L5.0ST5GH" SODFL1006X40N 1815,1185 r270 bottom (schematic designator D6)
D8 "ESD9L5.0ST5GH" SODFL1006X40N 1565,1285 r180 bottom (schematic designator D7)
D9 "PESD12VS1UL,315" PESD5V0S1BL315 2330,180 r0 top (schematic designator D8)
D10 "PESD12VS1UL,315" PESD5V0S1BL315 2434.76,180 r180 top (schematic designator D9)
FB1 "BLM18HE601SN1D" BLM18SP221SN1B 1720,1115 r0 top
FB2 "BLM18AG102SN1D" BLM18SP221SN1B 2290.34,370.15 r270 top (schematic designator FB1)
FB3 "BLM18AG102SN1D" BLM18SP221SN1B 1368.78,1210 r0 bottom (schematic designator FB1)
FB4 "BLM18AG102SN1D" BLM18SP221SN1B 1830.87,1061.61 r180 top (schematic designator FB1)
FB5 "BLM18AG102SN1D" BLM18SP221SN1B 2225,185 r0 bottom (schematic designator FB2)
FB6 "BLM18AG102SN1D" BLM18SP221SN1B 1730,510 r90 top (schematic designator FB3)
J1 "TC2030-NL" TC2030NL 2681.14,1213.24 r270 bottom (schematic designator J2)
J2 "860-10-002-10-001101" 8601000210001101 1925.63,1300 r0 top (schematic designator J1)
J3 "BC020-03-A-0200-0300-L-G" BC02003A02000300LG 1135.63,75 r180 top (schematic designator J4)
J4 "USB4215-03-A_REVA" GCT_USB4215-03-A_REVA 2670,785.08 r90 top (schematic designator J5)
J5 "B2B-XH-A-GU" B2BXHAGU 1861.57,100 r0 top (schematic designator J8)
J6 "DF52-12S-0.8H_21_" DF5212S08H21 1336.77,1297.95 r180 top (schematic designator J9)
J7 "M20-9990245" "HDR 2POS 2.54MM THRU HOLE" 2349.2,98.37 r0 top (schematic designator J10)
J8 "BM04B-GHS-TBT_LF__SN__N_" CONN_BM04B-GHS-TBT_JST 2635,415 r270 bottom (schematic designator J11)
J9 "PRT-14417" SPARKFUN_PRT-14417 2655,785 r270 bottom (schematic designator J12)
J10 "M20-9990245" "HDR 2POS 2.54MM THRU HOLE" 1780,1295 r180 top locked (schematic designator J13)
J11 "U.FL-R-SMT-1_10_" U.FL-R-SMT-1(10) 60,566.02 r90 bottom locked (schematic designator J14)
J12 "TC2030-NL" TC2030NL 1460,85 r0 bottom (schematic designator J15)
J13 "SMA_T_9.52_NF" CO_SAMTEC_SMA-J-P-ST-EMI 0,565 r90 bottom locked (schematic designator J17)
J14 "BC020-03-A-0200-0300-L-G" BC02003A02000300LG 940.97,1316.98 r180 bottom (schematic designator J7)
J15 "M20-9990245" "HDR 2POS 2.54MM THRU HOLE" 2115,95 r0 top (schematic designator J6)
L1 "744232090" WE-CNSW-SMD 2359.68,913.31 r90 top
L2 "DFE252012F-2R2M=P2" DFE2HCAH1R0MJ0L 2097.72,925 r90 top value=2.2uH (schematic designator L1)
L3 "10nH" LQW18AN10NG80D 245.94,565 r180 bottom (schematic designator L2)
L4 "DFE252012F-2R2M=P2" DFE2HCAH1R0MJ0L 1241.22,1207.56 r270 bottom value=2.2uH (schematic designator L1)
MEC1 "VLP-400-F" VLP-400-F 1645,790 r90 top
MH1 "Mounting Hole M2" "MOUNTING HOLE M2 UNPLATED" 2625,1275 r0 top
MH2 "Mounting Hole M2 Plated" "Mounting Hole M2 Plated" 130,130 r0 top
MH3 "Mounting Hole M2 Plated" "Mounting Hole M2 Plated" 130,1250 r0 top
MH4 "Mounting Hole M2 Plated" "Mounting Hole M2 Plated" 2625,130 r0 top
O1 "NO" SMT-JUMPER_2_NO_TRACE_SILK 1935,1075 r0 bottom net-tie
O2 "NO" SMT-JUMPER_2_NO_TRACE_SILK 1200,1130 r90 top net-tie
O3 "NO" SMT-JUMPER_2_NO_TRACE_SILK 1335,1130 r90 top net-tie
O4 "NO" SMT-JUMPER_2_NO_TRACE_SILK 1265,1130 r90 top net-tie
O5 "NC" SMT-JUMPER_2_NC_TRACE_SILK 2131.18,262.09 r0 bottom net-tie
O6 "NC" SMT-JUMPER_2_NC_TRACE_SILK 1765,1185 r0 top net-tie
O7 "NO" SMT-JUMPER_2_NO_TRACE_SILK 2250,265 r180 bottom net-tie
O8 "NO" SMT-JUMPER_2_NO_TRACE_SILK 1665,1185 r180 top net-tie
O9 "NC" SMT-JUMPER_2_NC_TRACE_SILK 1772.13,941.73 r180 top net-tie
O10 "NO" SMT-JUMPER_2_NO_TRACE_SILK 1045,1150 r270 top net-tie (schematic designator O15)
O11 "NC-Left" SMT-JUMPER_3_2-NCLEFT_TRACE_SILK 1310,215 r0 bottom net-tie (schematic designator O19)
O13 "NO" SMT-JUMPER_2_NO_TRACE_SILK 1205,1010 r90 top net-tie (schematic designator O14)
O14 "NO" SMT-JUMPER_2_NO_TRACE_SILK 1700,430 r270 bottom net-tie (schematic designator O13)
O15 "NC-Left" SMT-JUMPER_3_2-NCLEFT_TRACE_SILK 1534,205 r0 bottom net-tie (schematic designator O18)
Q1 "MMBT3904LT1G" SOT96P237X111-3N 2261.18,622.09 r0 bottom
Q2 "DMP2305U-7" SOT96P240X115-3N 2291.18,422.09 r270 bottom
Q3 "IRLML6401TRPBF" SOT95P237X112-3N 750,75.98 r0 top
Q4 "IRLML6401TRPBF" SOT95P237X112-3N 570.5,72.44 r0 top
Q5 "CSD75208W1015" BGA6C50P2X3_95X145X62 2275,715 r270 top (schematic designator Q1)
R1 "4.7K 0201 1% 100PPM" RES0201L 1300,625 r270 top value=4.7K
R2 "4.7K 0201 1% 100PPM" RES0201L 1330,625 r270 top value=4.7K
R3 "1kR" RESC0603X28N 2131.18,584.49 r180 bottom value=1KR
R4 "CRCW040210K0JNEDC" RESC1005X40N 2301.18,527.09 r180 bottom value=10kR
R5 "ERA-3AEB124V" ERA3AEB101V 2346.18,267.09 r270 bottom value=120kR
R6 "ERA-3AEB304V" ERA3AEB101V 2176.18,387.09 r270 bottom value=300kR
R7 "10M 0402 1%" RES0402L 620,40 r180 bottom value=10M
R8 "10M 0402 1%" RES0402L 1900,790 r0 top value=10M
R9 "10M 0402 1%" RES0402L 1868.67,899.11 r180 top value=10M
R10 "ERJ-U02F1002X" ERJS02_U02_(0402) 1935,395 r90 top value=10kR
R11 "CRCW0201383RFNED" RESC0603X28N 1890.16,395 r90 top value=383R
R12 "CRCW020127K4FNED" RESC0603X28N 1890,625 r270 top value=27.4kR
R13 "RC0402JR-7D1KL" RESC1005X40N 1510,850 r90 top value=1kR
R14 "RC0402JR-7D330RL" RESC1005X40N 1490,766.02 r0 top value=330R
R15 "CRCW04021K60JNED" RESC1005X40N 1633.54,625 r270 top value=1.6kR
R16 "10K 0201 1% 100PPM" RES0201L 2520,325 r180 top value=10K
R17 "0R 0201" RES0201N 2463.76,1176.35 r0 top value=0R
R18 "RC0201FR-7D1ML" RESC0603X26N 1505,650 r270 top value=1MR
R19 "RC0201FR-7D1ML" RESC0603X26N 1955,898.38 r90 bottom value=1MR
R20 "RC0201FR-7D1ML" RESC0603X26N 1620,388.39 r90 bottom value=1MR
R21 "RC0201FR-7D1ML" RESC0603X26N 1341.69,327.64 r90 top value=1MR
R22 "RC0201FR-7D1ML" RESC0603X26N 2133.39,620 r180 bottom value=1MR
R23 "750R 0201 1% 100PPM" RES0201L 1780,833.98 r90 top value=750R
R24 "330R 0201 1% 100PPM" RES0201L 1705,635 r180 top value=330R
R25 "1.6K 0201 1% 100PPM" RES0201L 1705,665 r180 top value=1.6K
R26 "Resistor" R0402 670,245 r90 top value=NF
R27 "1kR" RESC0603X28N 1681.81,1048.82 r270 top value=1KR
R28 "RC0201FR-7D1ML" RESC0603X26N 1630,960 r90 top value=1MR
R29 "RES NF 0402" RES0402N_NF 1425,665 r270 top value=NF
R30 "1kR" RESC0603X28N 1575.43,1122.91 r180 top value=1KR
R31 "0R 0402" RES0402N 1470,665 r90 top value=0R
R32 "1kR" RESC0603X28N 1416.81,1101.37 r270 top value=1KR (schematic designator R33)
R33 "CRCW02015K10JNED" RESC0603X28N 2540,1040 r270 top value=5.1kR (schematic designator R35)
R34 "CRCW02015K10JNED" RESC0603X28N 2377.99,660 r90 top value=5.1kR (schematic designator R36)
R35 "DNP" RESC1005X40N 2145,670 r270 top value=0R (schematic designator R5)
R36 "CRCW020120K0FKED" RESC0603X28N 2287.76,610 r0 top value=20kR (schematic designator R2)
R37 "RC0201FR-7D10KL" RESC0603X26N 2391.38,595.75 r0 top value=10KR (schematic designator R4)
R38 "ERJ-1GNF2550C" RESC0603X28N 2320.35,647.24 r0 top value=255R (schematic designator R1)
R39 "CRCW0201196RFKED" RESC0603X28N 2230,615 r270 top value=196R (schematic designator R3)
R40 "ERJ-U02F4700X" ERJS02_U02_(0402) 1149.64,800 r0 top value=470R (schematic designator R1)
R41 "CRCW04023K30FKED" RESC1005X40N 264.92,829.68 r180 bottom value=3.3KR (schematic designator R2)
R42 "ERJ-U02F4700X" ERJS02_U02_(0402) 1149.64,725 r0 top value=470R (schematic designator R3)
R43 "ERJ-U02F22R0X" ERJS02_U02_(0402) 1149.64,650.2 r0 top value=22R (schematic designator R4)
R44 "ERJ-U02F22R0X" ERJS02_U02_(0402) 744.8,245 r90 top value=22R (schematic designator R5)
R45 "CRCW020136K5FNED" RESC0603X28N 1865.15,846.38 r180 top value=36.5KR (schematic designator R1)
R46 "RC0201FR-070RL" RESC0603X26N 1870.48,933.42 r180 top value=0R (schematic designator R2)
R47 "CRCW02012K74FNED" RESC0603X28N 1860.87,990.13 r270 top value=2.74kR (schematic designator R3)
R49 "CRCW040249K9FKED" RESC1005X40N 480,165 r180 top value=49.9kR (schematic designator R37)
R51 "1kR" RESC0603X28N 1411.97,1029.13 r270 top value=1KR (schematic designator R32)
R52 "CRCW04020000Z0EEHP" RESC1005X40N 2040,690 r0 top value=0R (schematic designator R38)
R53 "CRCW04020000Z0EEHP" RESC1005X40N 1880,690 r0 top value=0R (schematic designator R39)
R54 "4.7K 0201 1% 100PPM" RES0201L 1255,835 r90 top value=4.7K (schematic designator R40)
R55 "CRCW04020000Z0EEHP" RESC1005X40N 1960,715 r90 top value=0R (schematic designator R41)
R56 "4.7K 0201 1% 100PPM" RES0201L 1370,630 r0 top value=4.7K (schematic designator R42)
R57 "RC0201FR-7D1ML" RESC0603X26N 1475,486.61 r270 top value=1MR (schematic designator R43)
R58 "RC0201FR-0710ML" RESC0603X26N 910,156.61 r270 top value=10MR (schematic designator R44)
R59 "RC0201FR-7D1ML" RESC0603X26N 1850,1191.3 r270 bottom value=1MR (schematic designator R45)
R60 "RC0201FR-7D1ML" RESC0603X26N 1568.39,1325 r180 bottom value=1MR (schematic designator R46)
R61 "4.7K 0201 1% 100PPM" RES0201L 2470.83,379.48 r270 bottom value=4.7K (schematic designator R48)
R62 "4.7K 0201 1% 100PPM" RES0201L 2470,450 r270 bottom value=4.7K (schematic designator R49)
R63 "CRCW0201100KJNED" RESC0603X28N 1315,946.22 r90 top value=100kR (schematic designator R47)
R65 "0R" RESC1005X40N 1725,195 r270 bottom value=0mR (schematic designator R52)
R66 "RC0201FR-7D1ML" RESC0603X26N 1030,1285 r90 bottom value=1MR (schematic designator R53)
R67 "RC0201FR-7D1ML" RESC0603X26N 783.55,1180.62 r315 bottom value=1MR (schematic designator R54)
R68 "CRCW020136K5FNED" RESC0603X28N 1230,1305 r180 bottom value=36.5KR (schematic designator R1)
R69 "RC0201FR-070RL" RESC0603X26N 950,1228.39 r270 bottom value=0R (schematic designator R2)
R70 "CRCW02012K74FNED" RESC0603X28N 1020,1175 r90 bottom value=2.74kR (schematic designator R3)
SW1 "CT8132BV-IS3" SOT95P280X140-3N 400,75 r180 top
SW2 "PTS820J2x" TL1015 2640,375 r270 top
TP14 "TP-SMD-RFBUSY" TP_simplepad#1 948.83,109.71 r270 bottom
TP15 "TP-SMD-RFNRST" TP_simplepad#2 1007.11,165.92 r135 bottom
TP16 "TP-SMD-SDA" TP_simplepad#1 1351.18,500.35 r270 bottom
TP17 "TP-SMD-SCL" TP_simplepad#2 1296.73,441.79 r135 bottom
U1 "BQ25176MDSGR" SON50P200X200X80-9N 1900,505 r90 top
U2 "ISP1807-LR" ISP1807-LR 2400,1185 r0 bottom
U3 "IS25LP128F-JKLE" SON127P600X80_HS-9N 2260,820 r0 bottom
U4 "TPS22960RSER" TPS22960RSER 1408.43,404.68 r180 top
U5 "ADS1115IRUGR" ADS1115IRUGR 1541.69,1003.07 r90 top
U6 "USBLC6-2SC6" SOT95P280X145-6N 2359.64,1081.8 r90 top (schematic designator U7)
U7 "BQ51003YFPT" BGA28C40P4X7_188X301X50 2291.38,495.75 r180 top (schematic designator U1)
U8 "BMA400" LGA12-BMA400 1350,760 r0 top (schematic designator U1)
U9 "SAM-M10Q-00B" SAMM10Q00B 670,725 r0 top (schematic designator U1)
U10 "TPS63901YCJR" BGA12C35P3X4_111X146X35 1961.73,914.65 r180 top (schematic designator U1)
U11 "TPS22916BYFPR" BGA4C40P2X2_78X78X50 1533.62,353.34 r0 bottom (schematic designator U6)
U12 "stm32wl-SMD" stm32wl-SMD_shortlegs 1432.28,635.36 r225 bottom (schematic designator U9)
U13 "TPS63901YCJR" BGA12C35P3X4_111X146X35 1103.99,1204.47 r180 bottom (schematic designator U1)

## Footprints (in the part's own frame and the unit in brackets; to place one, negate y for a bottom-side part, rotate by r counter-clockwise, add the part's x,y. Pads: shape width x height; smd on the part's side, far side on the other; paste and mask are expansions set on the pad)
0402 [mm]
  rect 0.7x0.7 smd: 1(0.035,0) 2(1.233,0)
  body extent -0.38,-0.36 1.65,0.36, height 0.82
8601000210001101 [mm]
  rect 0.85x0.85 hole 0.6: 1(0,0)
  round 0.85 hole 0.6: 2(1,0)
  silkscreen extent -1.6,-1 2,1, body extent -1,-1 2,1, height 3.73
ADS1115IRUGR [mm]
  rect 0.3x0.575 smd: 1(-0.75,-0.638) 4(0.75,-0.638) 6(0.75,0.638) 9(-0.75,0.638)
  rect 0.25x0.575 smd: 2(-0.25,-0.638) 3(0.25,-0.638) 7(0.25,0.638) 8(-0.25,0.638)
  rect 0.63x0.35 smd: 5(0.86,0) 10(-0.86,0)
  silkscreen extent -1,-1.25 -0.9,-1.15, body extent -1,-0.75 1,0.75, height 0.4
B2BXHAGU [mm]
  rect 1.5x1.5 hole 1: 1(0,0)
  round 1.5 hole 1: 2(2.5,0)
  silkscreen extent -3.2,-2.35 4.95,3.4, body extent -2.45,-2.36 4.95,3.39, height 7.55
BC02003A02000300LG [mm]
  round 0.75 hole 0.5: 1(-1,0) 2(0,0) 3(1,0)
  silkscreen extent -2.1,-0.05 -2,0.05, body extent -1.5,-0.64 1.5,0.64, height 3.3
BGA4C40P2X2_78X78X50 [mm]
  round 0.226 smd: A1(-0.2,0.2) A2(0.2,0.2) B1(-0.2,-0.2) B2(0.2,-0.2)
  silkscreen extent -0.76,-0.66 0.66,0.76, body extent -0.39,-0.39 0.39,0.39, height 0.5
BGA6C50P2X3_95X145X62 [mm]
  round 0.298 smd: A1(-0.25,0.5) A2(0.25,0.5) B1(-0.25,0) B2(0.25,0) C1(-0.25,-0.5) C2(0.25,-0.5)
  silkscreen extent -0.85,-1 0.75,1.1, body extent -0.48,-0.72 0.48,0.72, height 0.63
BGA12C35P3X4_111X146X35 [mm]
  round 0.169 smd: A1(-0.35,0.525) A2(0,0.525) A3(0.35,0.525) B1(-0.35,0.175) B2(0,0.175) B3(0.35,0.175) C1(-0.35,-0.175) C2(0,-0.175) C3(0.35,-0.175) D1(-0.35,-0.525) D2(0,-0.525) D3(0.35,-0.525)
  silkscreen extent -0.88,-0.96 0.78,1.06, body extent -0.56,-0.73 0.56,0.73, height 0.35
BGA28C40P4X7_188X301X50 [mm]
  round 0.226 smd: A1(-0.6,1.2) A2(-0.2,1.2) A3(0.2,1.2) A4(0.6,1.2) B1(-0.6,0.8) B2(-0.2,0.8) B3(0.2,0.8) B4(0.6,0.8) C1(-0.6,0.4) C2(-0.2,0.4) C3(0.2,0.4) C4(0.6,0.4) D1(-0.6,0) D2(-0.2,0) D3(0.2,0) D4(0.6,0) E1(-0.6,-0.4) E2(-0.2,-0.4) E3(0.2,-0.4) E4(0.6,-0.4) F1(-0.6,-0.8) F2(-0.2,-0.8) F3(0.2,-0.8) F4(0.6,-0.8) G1(-0.6,-1.2) G2(-0.2,-1.2) G3(0.2,-1.2) G4(0.6,-1.2)
  silkscreen extent -1.16,-1.66 1.06,1.76, body extent -0.94,-1.5 0.94,1.5, height 0.5
BLM18SP221SN1B [mm]
  rect 0.65x0.7 smd: 1(-0.675,0) 2(0.675,0)
  silkscreen extent 0,-0.3 0,0.3, body extent -0.8,-0.4 0.8,0.4, height 0.8
CAP0201L [mm]
  rect 0.36x0.32 smd: 1(-0.28,0) 2(0.28,0)
  body extent -0.31,-0.16 0.31,0.16, height 0.3
CAPC0603X33N [mm]
  rect 0.46x0.42 smd: 1(-0.33,0) 2(0.33,0)
  body extent -0.3,-0.15 0.3,0.15, height 0.33
CAPC0603X35N [mm]
  rect 0.46x0.42 smd: 1(-0.33,0) 2(0.33,0)
  body extent -0.3,-0.15 0.3,0.15, height 0.35
CAPC1005X55N [mm]
  rect 0.6x0.62 smd: 1(-0.46,0) 2(0.46,0)
  body extent -0.5,-0.25 0.5,0.25, height 0.55
CAPC1005X70N [mm]
  rect 0.69x0.72 smd: 1(-0.46,0) 2(0.46,0)
  body extent -0.5,-0.25 0.5,0.25, height 0.7
CAPC1608X90N [mm]
  rect 0.75x0.94 smd: 1(-0.7,0) 2(0.7,0)
  body extent -0.8,-0.45 0.8,0.45, height 0.8
CAPC1709X100N [mm]
  rect 0.81x1.04 smd: 1(-0.72,0) 2(0.72,0)
  body extent -0.85,-0.45 0.85,0.45, height 1
CAPC3216X180N [mm]
  rect 1.07x1.82 smd: 1(-1.38,0) 2(1.38,0)
  silkscreen extent 0,-0.7 0,0.7, body extent -1.6,-0.8 1.6,0.8, height 1.8
CO_SAMTEC_SMA-J-P-ST-EMI [mm] "SMA Jack CMS, Edge Mountt Receptacle 50Ohm, 5-Leads, Body 6.35x6.35x9.52mm, pitch 2.825mm"
  rect 1.27x0 smd mask+0: 1(0,1.9)
  rect 1.35x4.2 smd far side mask+0.05: 2(-2.825,2.1) 2(2.825,2.1)
  rect 1.35x4.2 smd mask+0.05: 2(-2.825,2.1) 2(2.825,2.1)
  silkscreen extent -1.8,3.95 1.8,3.95, body extent -3.17,-10.13 3.18,3.2, height 3.8
CONN_BM04B-GHS-TBT_JST [mil]
  rect 26x67 smd: 1(-73.82,77.82) 2(-24.61,77.82) 3(24.61,77.82) 4(73.82,77.82)
  rect 43x114 smd: MP1(146.65,-54.07) MP2(-146.65,-54.07)
  silkscreen extent -252,-103 168,102, body extent -162,-84 162,111, height 159
DF5212S08H21 [mm]
  rect 0.5x1 smd: 1(-4.4,1.345) 2(-3.6,1.345) 3(-2.8,1.345) 4(-2,1.345) 5(-1.2,1.345) 6(-0.4,1.345) 7(0.4,1.345) 8(1.2,1.345) 9(2,1.345) 10(2.8,1.345) 11(3.6,1.345) 12(4.4,1.345)
  rect 0.9x1.6 smd: 13(-5.65,-0.575) 14(5.65,-0.575)
  silkscreen extent -5.9,-1.38 5.9,1.38, body extent -5.9,-1.16 5.9,1.61, height 1.75
DFE2HCAH1R0MJ0L [mm]
  rect 0.85x2.2 smd: 1(-1.025,0) 2(1.025,0)
  silkscreen extent 0,-1 0,1, body extent -1.25,-1 1.25,1, height 1.2
ERA3AEB101V [mm]
  rect 0.65x0.9 smd: 1(-0.725,0) 2(0.725,0)
  silkscreen extent -1.35,-0.05 -1.25,0.05, body extent -0.8,-0.4 0.8,0.4, height 0.45
ERJS02_U02_(0402) [mm]
  rect 0.475x0.5 smd: 1(-0.513,0) 2(0.513,0)
  silkscreen extent -1.16,-0.05 -1.06,0.05, body extent -0.5,-0.25 0.5,0.25, height 0.35
GCT_USB4215-03-A_REVA [mm]
  rect 0.6x1.15 smd: A1_B12(-3.2,4.575) A4_B9(-2.4,4.575) B1_A12(3.2,4.575) B4_A9(2.4,4.575)
  rect 0.3x1.15 smd: A5(-1.25,4.575) A6(-0.25,4.575) A7(0.25,4.575) A8(1.25,4.575) B5(1.75,4.575) B6(0.75,4.575) B7(-0.75,4.575) B8(-1.75,4.575)
  oval 1x2.2 hole 0.6 slot 1.8 at 90 deg: SHIELD(-4.32,0) SHIELD(4.32,0)
  oval 1x1.8 hole 0.6 slot 1.4 at 90 deg: SHIELD(-4.32,4) SHIELD(4.32,4)
  silkscreen extent -4.47,-2.08 4.47,5.8, body extent -4.47,-2.03 4.47,4.72, height 3.28
GRM15x [mm]
  rect 0.45x0.6 smd: 1(-0.475,0) 2(0.475,0)
  silkscreen extent -1.05,-0.05 -0.95,0.05, body extent -0.5,-0.28 0.5,0.27, height 0.5
GRM18x [mm]
  rect 0.65x0.7 smd: 1(-0.675,0) 2(0.675,0)
  silkscreen extent 0,-0.4 0,0.4, body extent -0.8,-0.45 0.8,0.45, height 0.8
"HDR 2POS 2.54MM THRU HOLE" [mm]
  rect 1.9x1.9 hole 1: 1(0,0)
  round 1.9 hole 1: 2(2.54,0)
  silkscreen extent -1.25,-1.27 3.83,1.27, body extent -1.25,-1.27 3.83,1.27, height 8.65
ISP1807-LR [mm]
  rect 0.8x0.8 smd mask+0.05: 1(-3.5,3.5) 7(-3.5,0.4) 25(3.5,0.4) 31(3.5,3.5) 68(-3.5,-3.5) 75(3.5,-3.5)
  rect 0.4x0.4 smd mask+0.05: 2(-3.7,2.6) 3(-3.05,2.275) 4(-3.7,1.95) 5(-3.05,1.625) 6(-3.7,1.3) 8(-2.6,0.2) 9(-2.275,0.85) 10(-1.95,0.2) 11(-1.625,0.85) 12(-1.3,0.2) 13(-0.975,0.85) 14(-0.65,0.2) 15(-0.325,0.85) 16(0,0.2) 17(0.325,0.85) 18(0.65,0.2) 19(0.975,0.85) 20(1.3,0.2) 21(1.625,0.85) 22(1.95,0.2) 23(2.275,0.85) 24(2.6,0.2) 26(3.7,1.3) 27(3.05,1.625) 28(3.7,1.95) 29(3.05,2.275) 30(3.7,2.6) 32(2.6,3.7) 33(2.275,3.05) 34(1.95,3.7) 35(1.625,3.05) 36(1.3,3.7) 37(0.975,3.05) 38(0.65,3.7) 39(0.325,3.05) 40(0,3.7) 41(-0.325,3.05) 42(-0.65,3.7) 43(-0.975,3.05) 44(-1.3,3.7) 45(-1.625,3.05) 46(-1.95,3.7) 47(-2.275,3.05) 48(-2.6,3.7) 49(2.275,2.275) 50(1.625,2.275) 51(0.975,2.275) 52(0.325,2.275) 53(-0.325,2.275) 54(-0.975,2.275) 55(-1.625,2.275) 56(-2.275,2.275) 57(2.275,1.625) 58(1.625,1.625) 59(0.975,1.625) 60(0.325,1.625) 61(-0.325,1.625) 62(-0.975,1.625) 63(-1.625,1.625) 64(-2.275,1.625) 65(-3.7,-0.55) 66(-3.7,-1.55) 67(-3.7,-2.55) 69(-2.5,-3.7) 70(-1.5,-3.7) 71(-0.5,-3.7) 72(0.5,-3.7) 73(1.5,-3.7) 74(2.5,-3.7) 76(3.7,-2.55) 77(3.7,-1.55) 78(3.7,-0.55)
  body extent -4,-4 4,4.01, height 1.2
"LED RGB 0603" [mm]
  rect 0.5x0.4 smd: 1(-0.65,0.35) 2(-0.65,-0.35) 3(0.65,-0.35) 4(0.65,0.35)
  silkscreen extent -1.26,-0.7 0.25,0.7, body extent -0.8,-0.4 0.8,0.4, height 0.51
LGA12-BMA400 [mm]
  rect 0.3x0.35 smd: 1(-0.75,-0.775) 2(-0.25,-0.775) 3(0.25,-0.775) 4(0.75,-0.775) 7(0.75,0.775) 8(0.25,0.775) 9(-0.25,0.775) 10(-0.75,0.775)
  rect 0.35x0.3 smd: 5(0.775,-0.25) 6(0.775,0.25) 11(-0.775,0.25) 12(-0.775,-0.25)
  round 0.2 on Top Overlay: ""(-0.975,-1.225)
  Top Layer pour cut-out: -1.05,1.05 -1.05,-1.05 1.05,-1.05 1.05,1.05
  body extent -1,-1 1,1, height 1
LQW18AN10NG80D [mm]
  rect 0.57x1.15 smd: 1(-0.715,0) 2(0.715,0)
  silkscreen extent 0,-0.3 0,0.3, body extent -0.82,-0.5 0.82,0.5, height 0.9
"Mounting Hole M2 Plated" [mm]
  round 5.5 hole 2.2: 1(0,0)
"MOUNTING HOLE M2 UNPLATED" [mm]
  round 2 hole 2 unplated mask+0: 0(0,0)
  silkscreen extent -1.5,-1.5 1.5,1.5
MS421R_IV03E [mm]
  rect 1x1 smd paste+0 mask+0: +(2.022,2.032)
  rect 4.2x1.7 smd paste+0 mask+0: -(0.6,-1.85)
  Top Layer region: 0.22,2.705 2.705,2.705 2.705,0.22
PESD5V0S1BL315 [mm]
  rect 0.4x0.7 smd: 1(-0.35,0) 2(0.35,0)
  silkscreen extent -0.85,0 -0.75,0.1, body extent -0.5,-0.3 0.5,0.3, height 0.47
R0402 [mm]
  rect 0.51x0.7 smd mask+0.05: 1(-0.45,0) 2(0.45,0)
  body extent -0.52,-0.3 0.52,0.3, height 0.4
RES0201L [mm]
  rect 0.36x0.32 smd: 1(-0.28,0) 2(0.28,0)
  body extent -0.31,-0.16 0.31,0.16, height 0.3
RES0201N [mm]
  rect 0.46x0.42 smd: 1(-0.33,0) 2(0.33,0)
  silkscreen extent -0.5,-0.38 0.5,0.37, body extent -0.31,-0.16 0.31,0.16, height 0.3
RES0402L [mm]
  rect 0.5x0.45 smd: 1(-0.4,0) 2(0.4,0)
  body extent -0.55,-0.27 0.55,0.28, height 0.35